# Altium PCB CNEPuckRevF.PcbDoc (part 1 of 2)
Units mil, origin at the board's own origin, x right, y up, seen from the top; angles counter-clockwise.
Board outline 3831.74 x 3902.47 mil, 4 copper layers (Top Layer, Internal Plane 1, Internal Plane 2, Bottom Layer); 165 components, 118 nets, 543 pads, 169 vias.
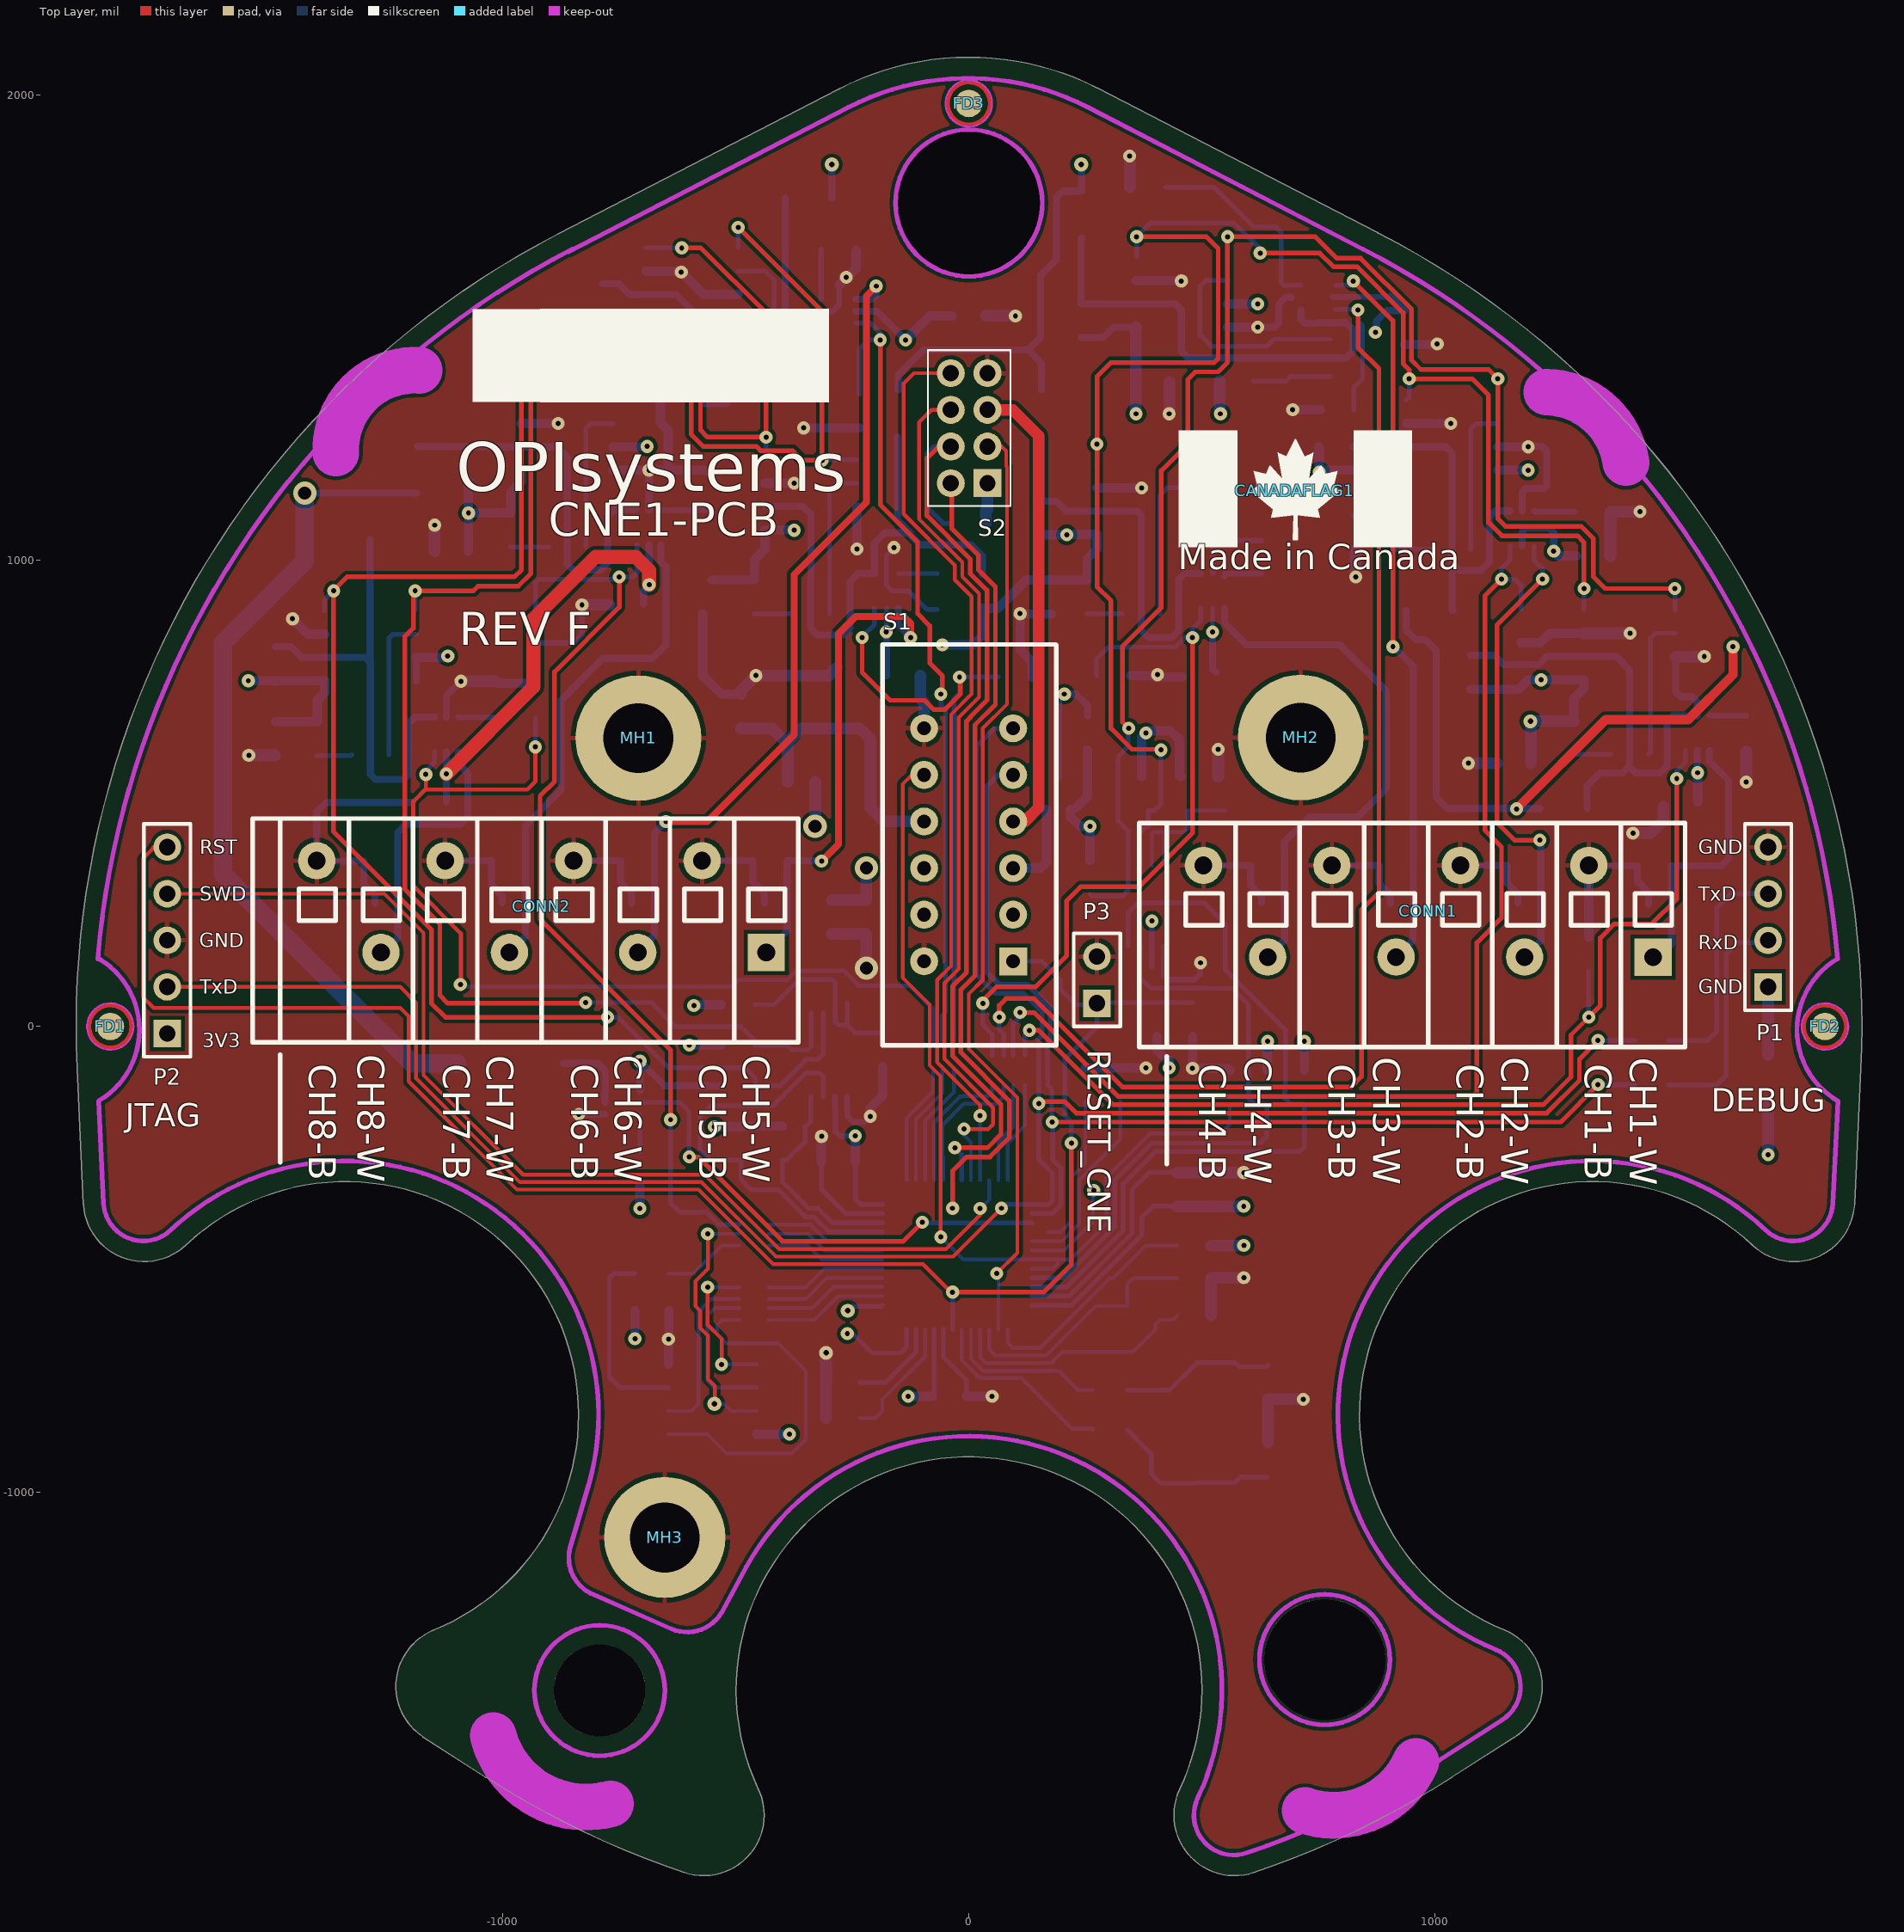
[diagram p0: Top Layer view]
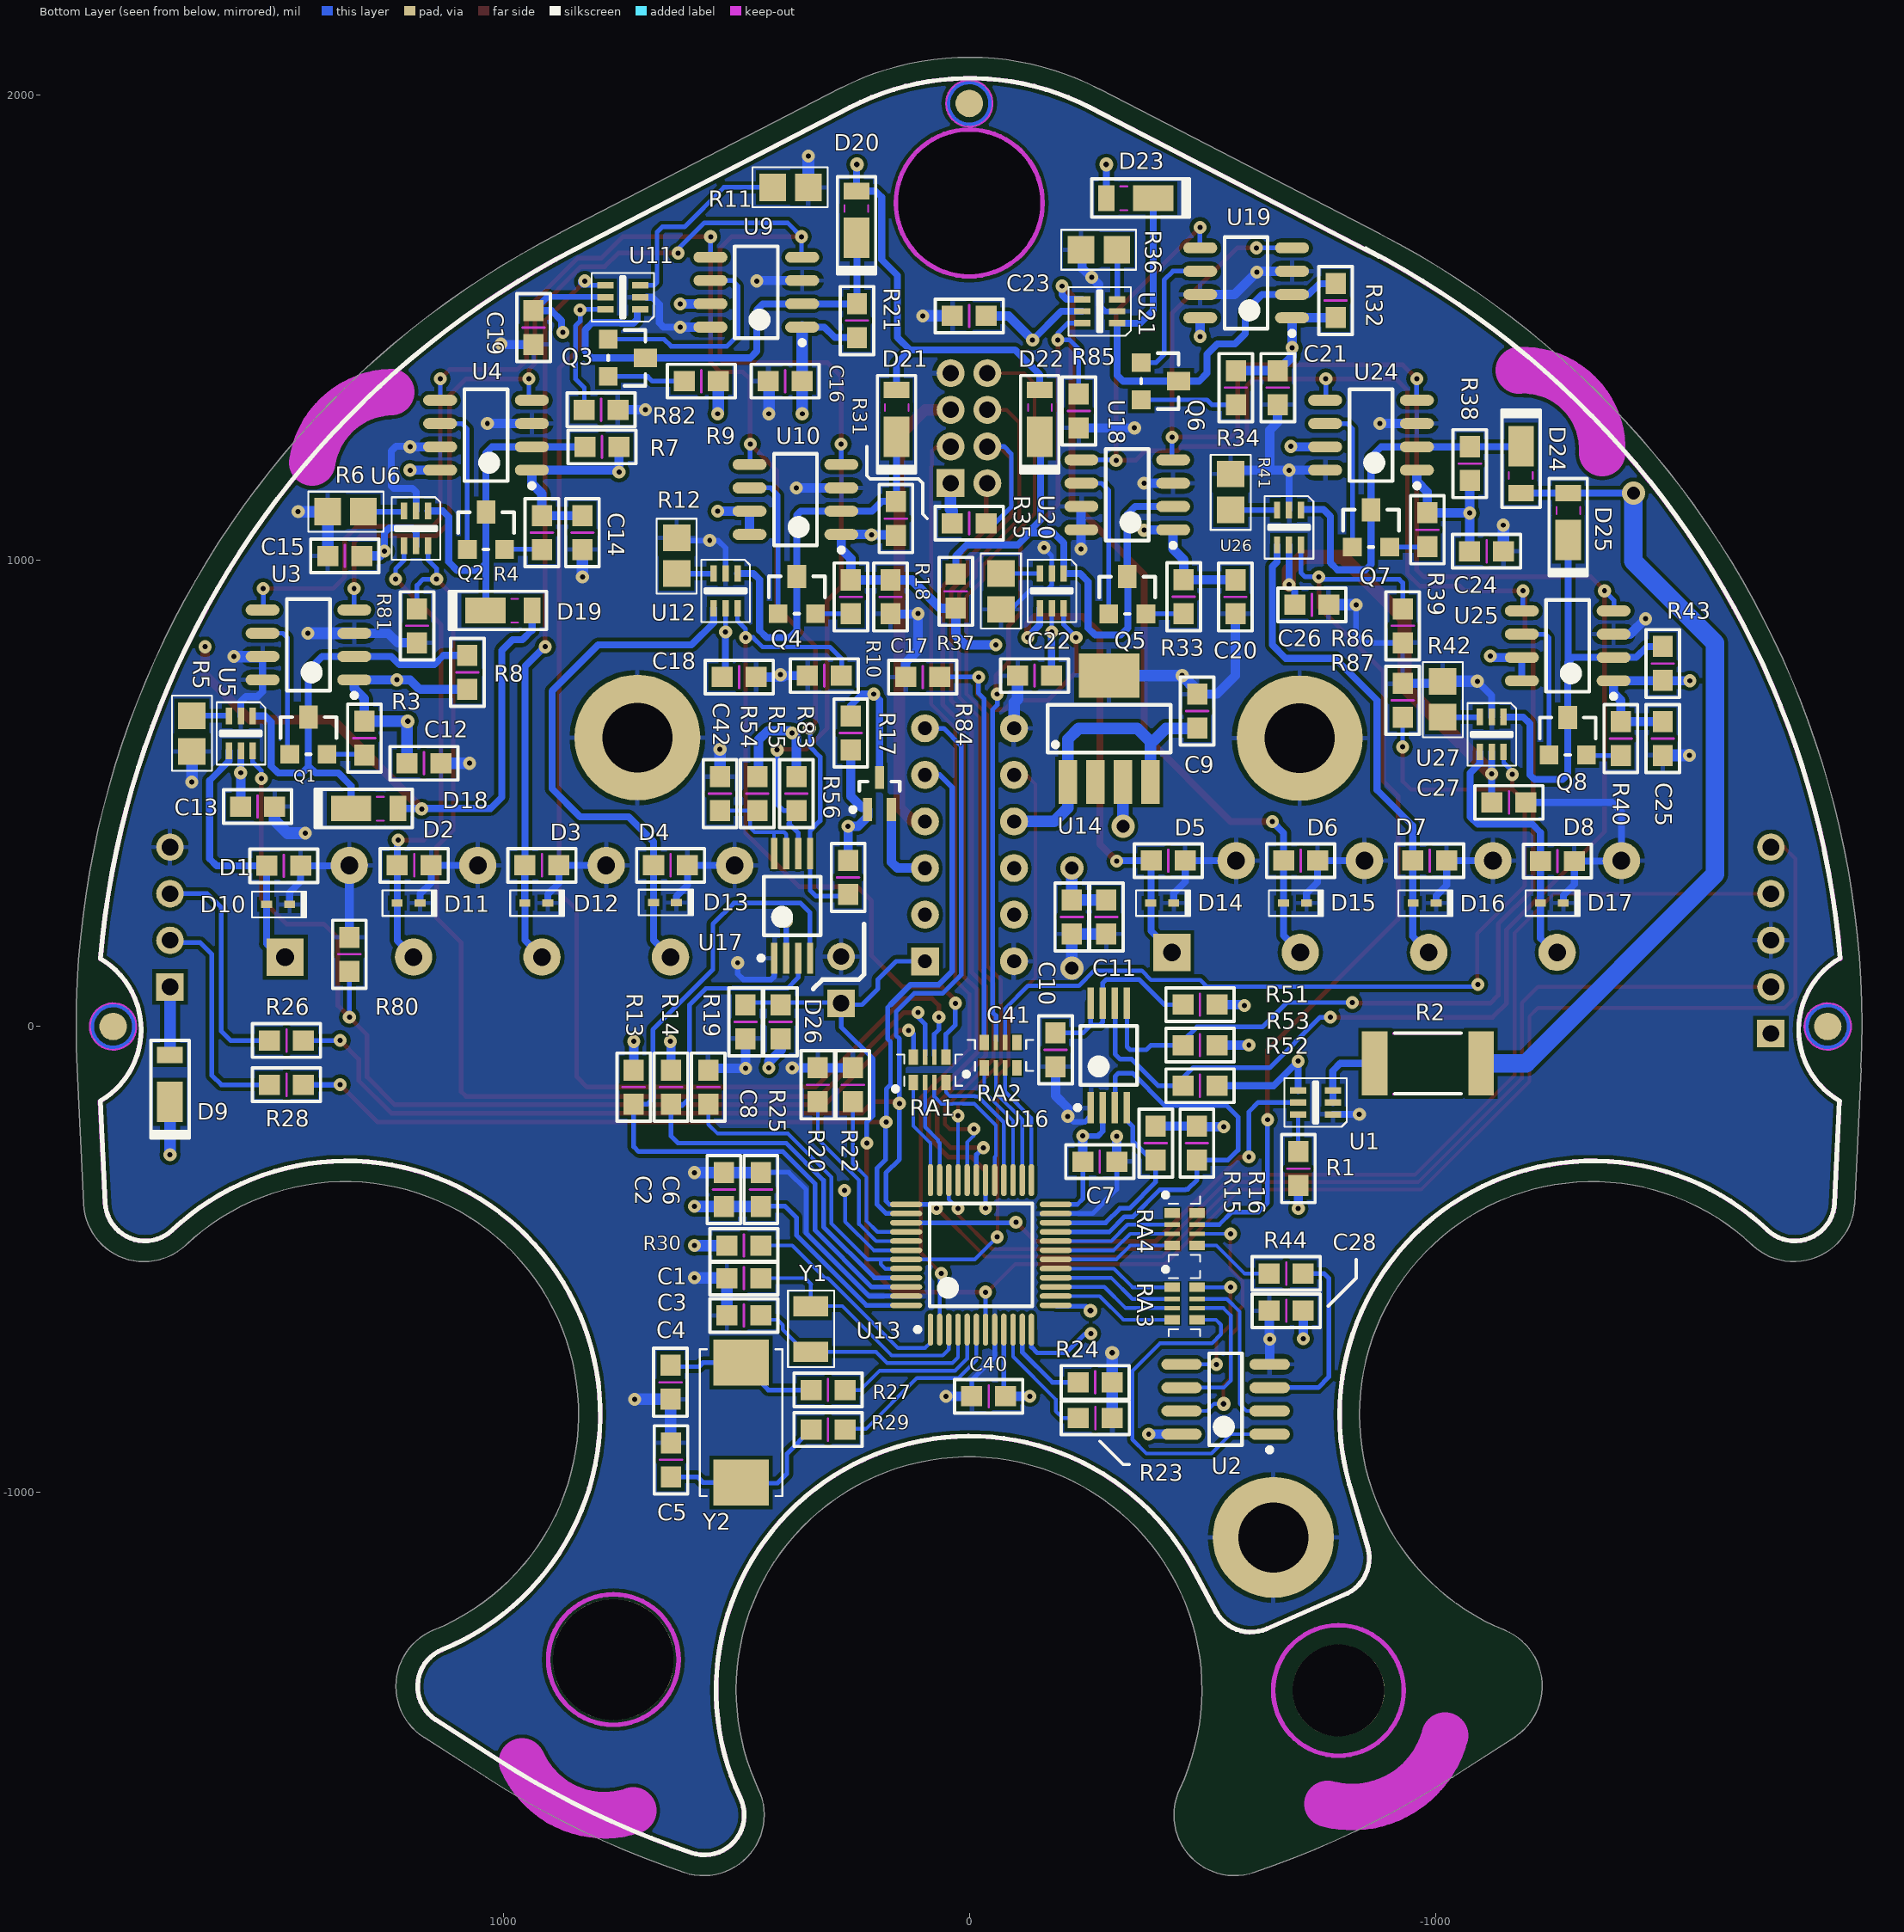
[diagram p1: Bottom Layer view, seen from below]
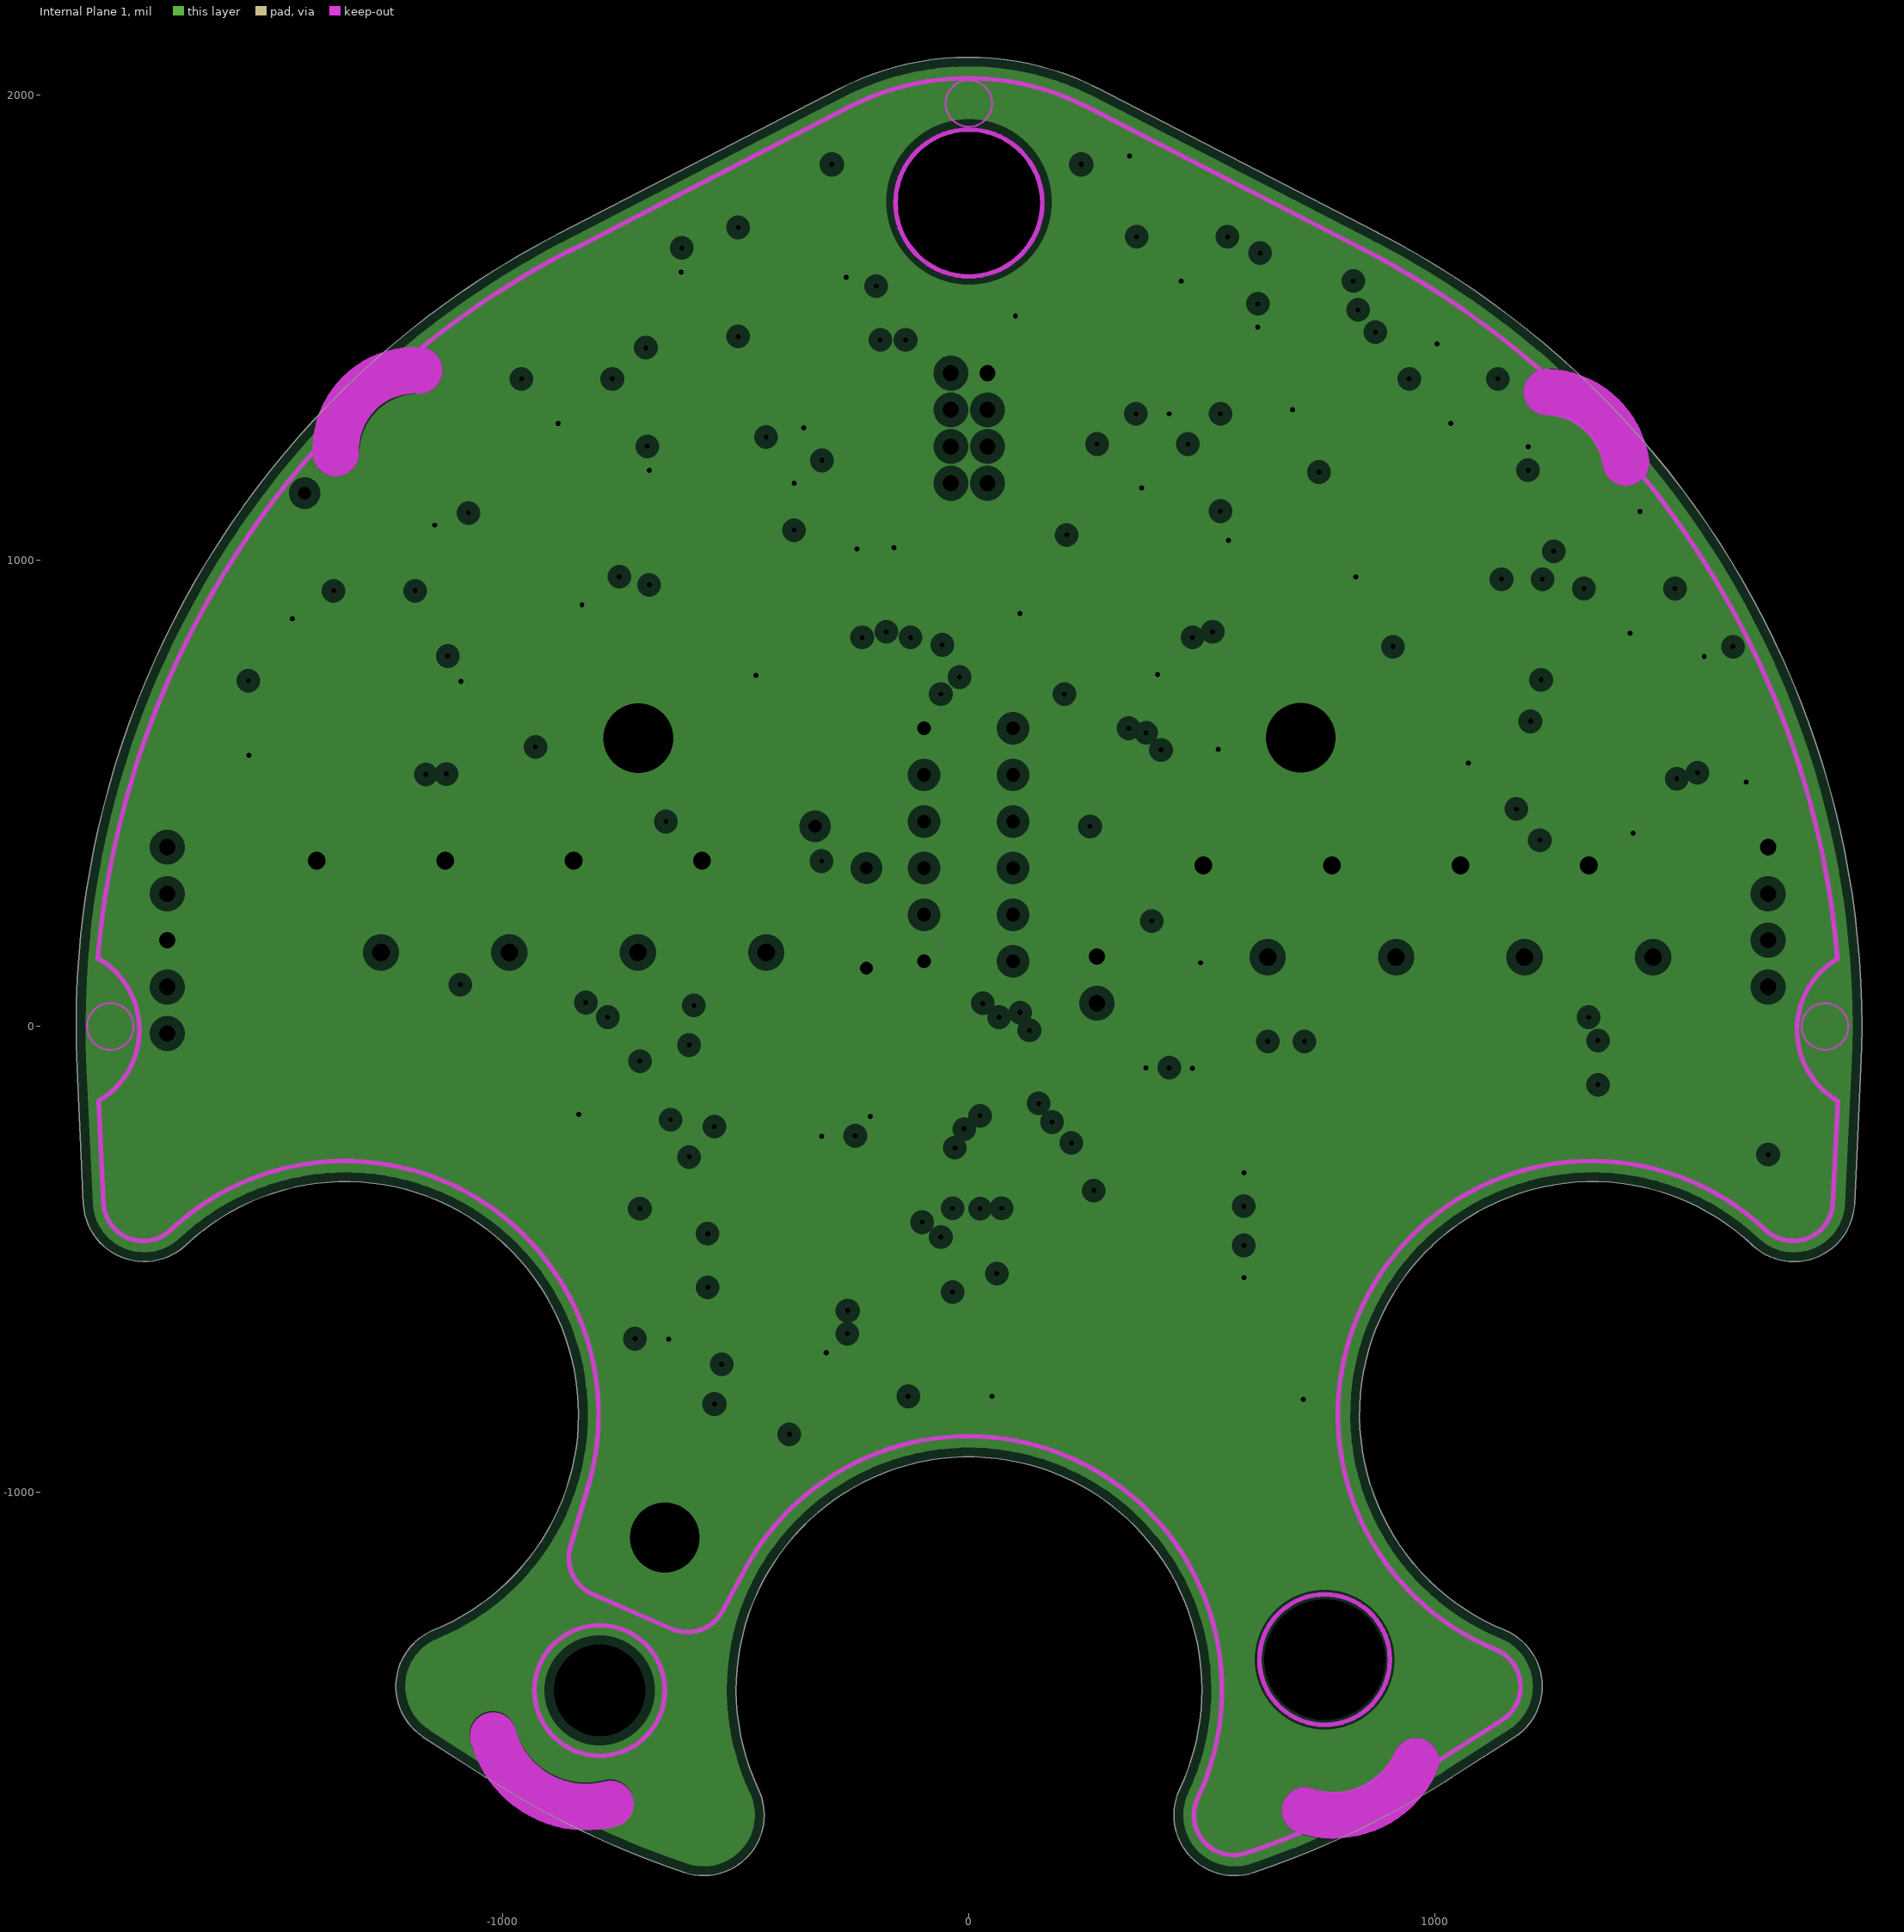
[diagram p2: Internal Plane 1, clearances drawn from the general rule]
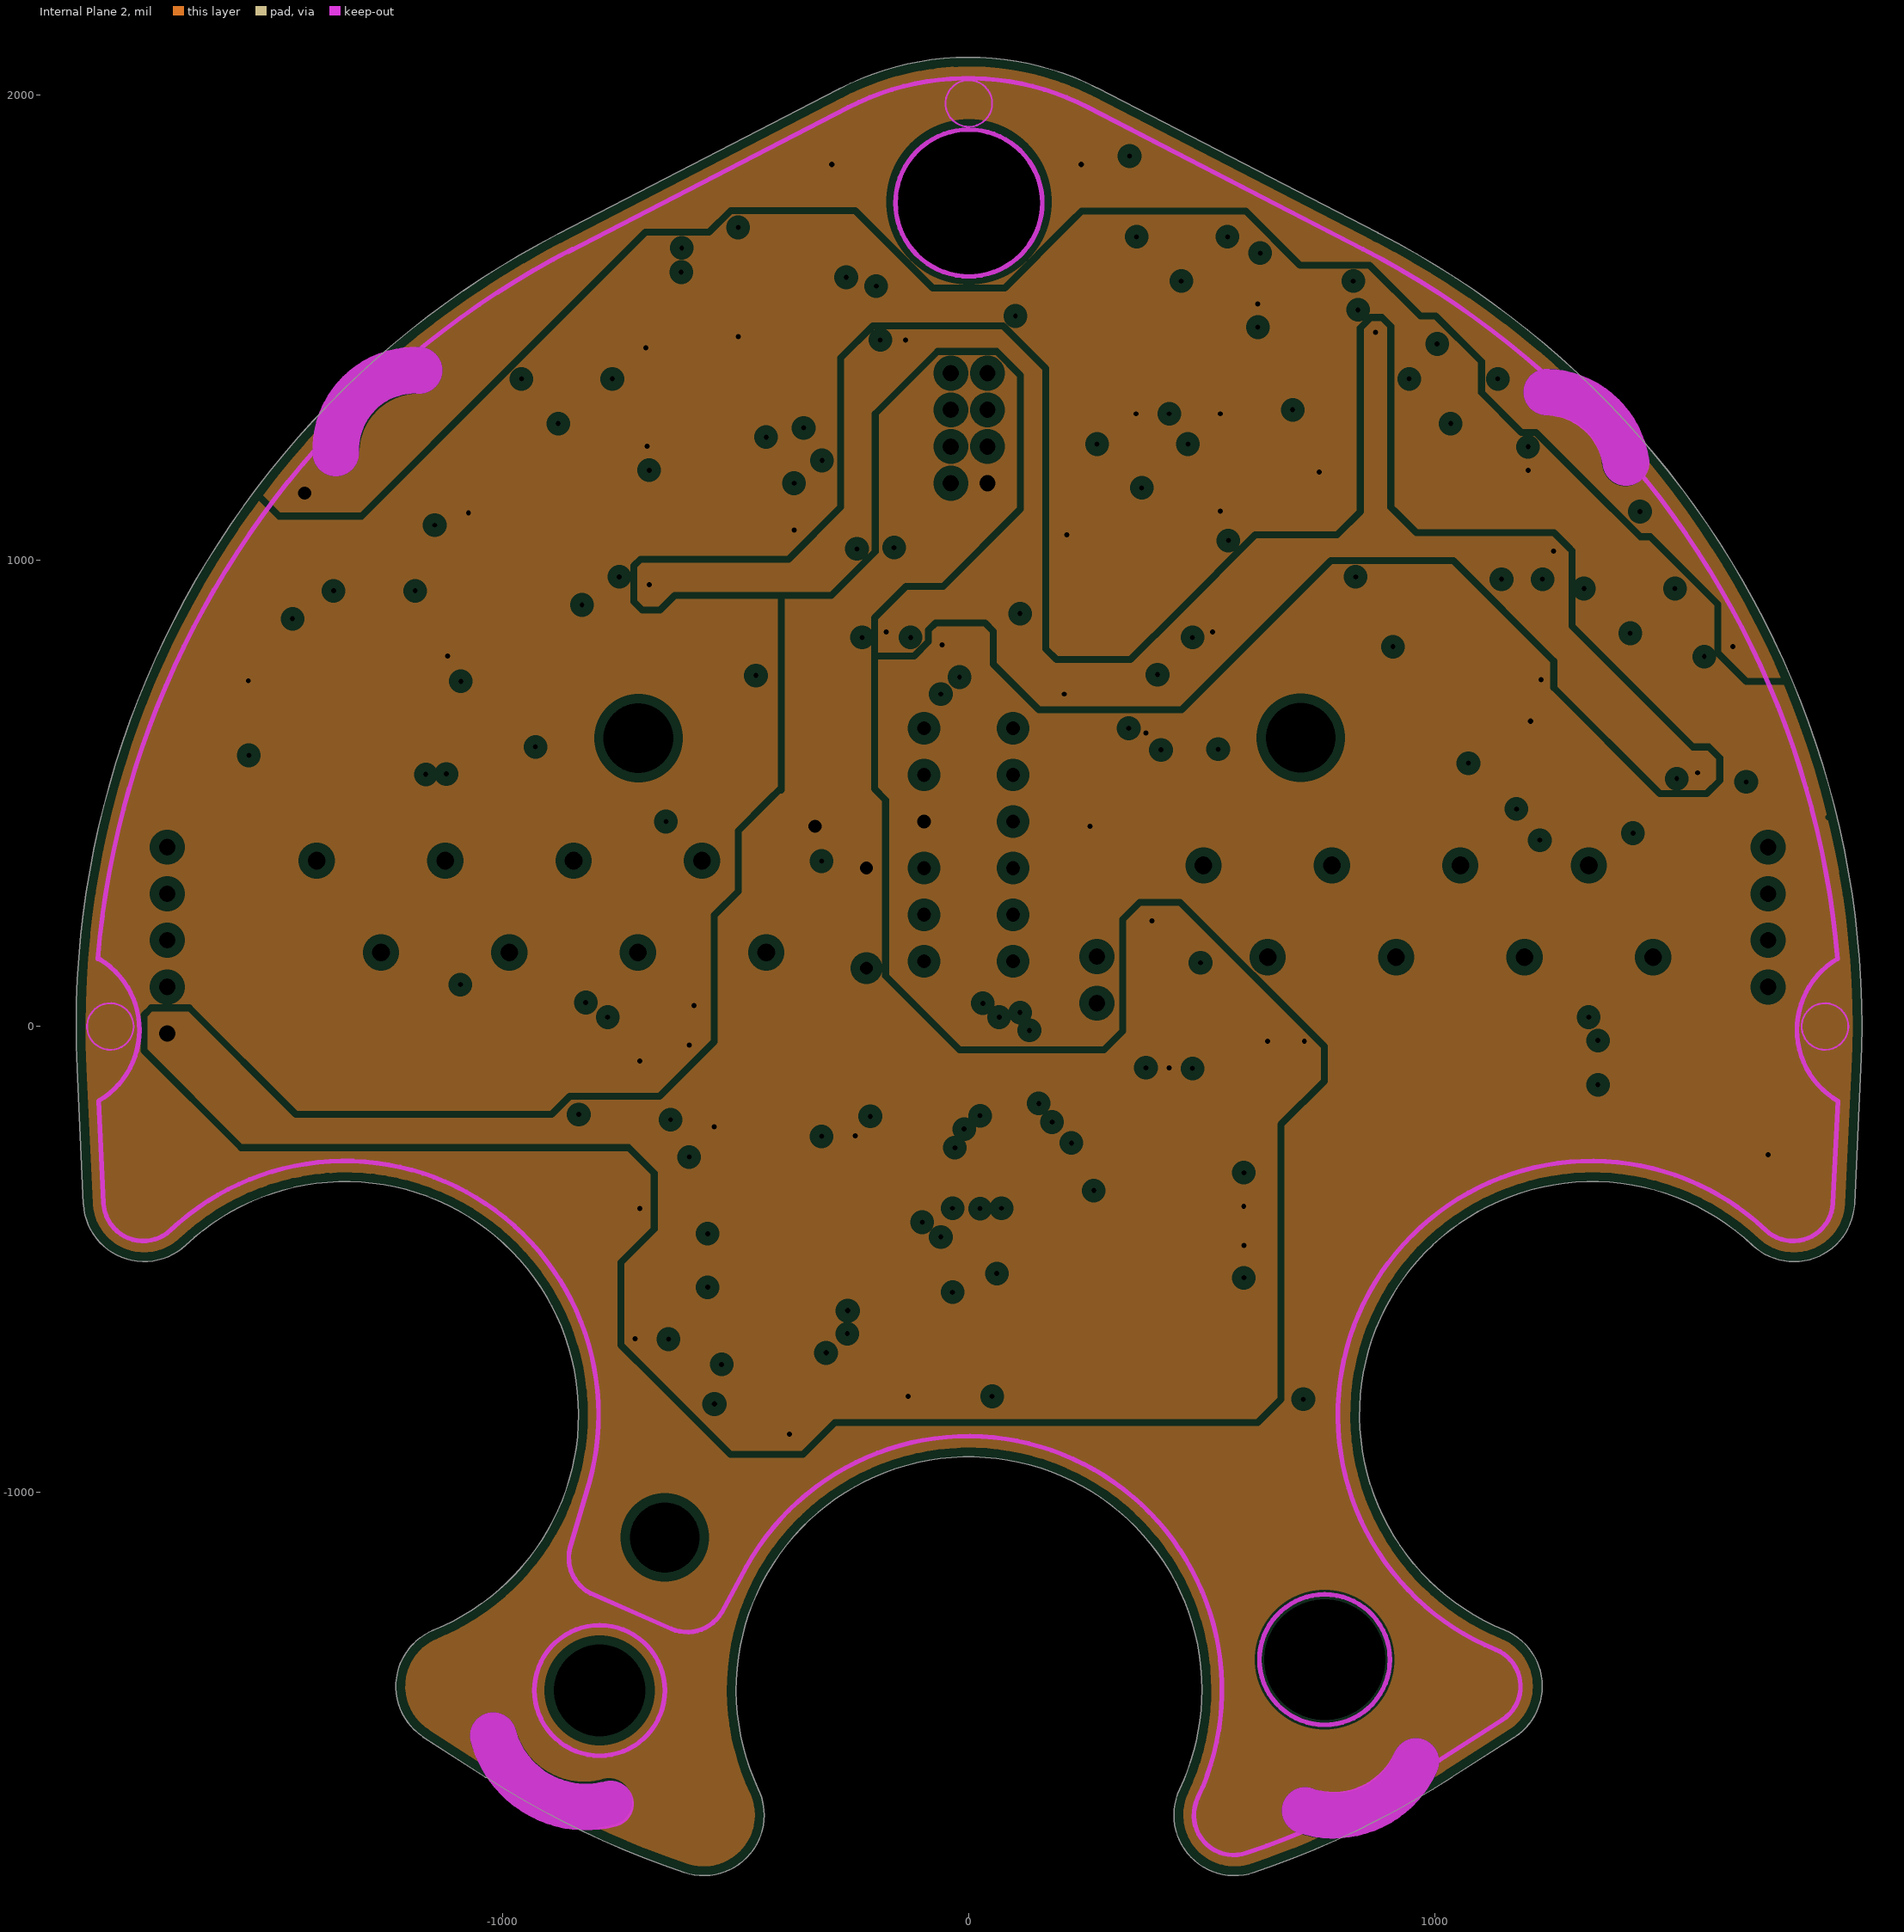
[diagram p3: Internal Plane 2, clearances drawn from the general rule]

## Layer stack, top to bottom
Top Solder: solder mask 0.4, Solder Resist, Dk 3.5
Top Layer: signal copper 1.4
Dielectric1: core 12.6, FR-4, Dk 4.8
Internal Plane 1: plane copper 1.4, net GND
Dielectric2: prepreg 12.6, FR-4, Dk 4.8
Internal Plane 2: plane copper 1.4, net (Multiple Nets)
Dielectric3: core 12.6, FR-4, Dk 4.8
Bottom Layer: signal copper 1.4
Bottom Solder: solder mask 0.4, Solder Resist, Dk 3.5

## Board outline
-1037.24,-1611.24 ccw(c-1035.89,-1609.13) -1035.13,-1611.52 ccw(c-1033.19,-1609.91) -1034.55,-1612.03 ccw(c0.48,0.2) -610.64,-1815.59 ccw(c-609.84,-1813.21) -610.58,-1815.61 ccw(c-569.13,-1692.27) -439.01,-1692.27 ccw(c-569.13,-1692.27) -451.45,-1636.75 ccw(c-453.74,-1637.78) -451.47,-1636.71 cw(c0.48,-1423.3) 500.28,-1423.3 cw(c0.48,-1423.3) 452.43,-1636.71 ccw(c454.7,-1637.78) 452.41,-1636.76 cw(c570.1,-1692.27) 452.43,-1636.71 452.41,-1636.76 ccw(c570.1,-1692.27) 611.54,-1815.61 ccw(c570.1,-1692.27) 611.6,-1815.59 ccw(c0.48,0.2) 1035.51,-1612.03 ccw(c1034.16,-1609.91) 1036.34,-1611.15 1169.37,-1525.76 ccw(c1169.15,-1523.25) 1170.5,-1525.37 ccw(c1100.21,-1415.87) 1230.33,-1415.87 ccw(c1100.21,-1415.87) 1149.41,-1295.41 ccw(c1100.21,-1415.87) 1149.36,-1295.39 1149.37,-1295.39 cw(c1338.18,-832.62) 1681.23,-469.15 ccw(c1682.96,-467.33) 1681.27,-469.19 cw(c1770.55,-374.52) 1681.23,-469.15 1681.27,-469.19 ccw(c1770.55,-374.52) 1900.53,-380.65 ccw(c1898.01,-380.53) 1900.53,-380.53 ccw(c1898.01,-380.53) 1900.5,-380.13 1914.15,-90.57 ccw(c1911.72,-89.93) 1914.23,-90.05 ccw(c0.48,0.2) 1916.36,0.2 ccw(c0.48,0.2) 879.2,1702.68 ccw(c878.04,1700.45) 877.71,1702.94 ccw(c875.35,1702.07) 876.5,1704.31 276,2014.25 ccw(c274.85,2012.02) 274.98,2014.53 ccw(c0.48,1473.57) -277.74,2012.62 ccw(c-276.59,2010.39) -278.56,2011.95 ccw(c-278.89,2009.45) -280.04,2011.69 -880.54,1701.74 ccw(c-879.38,1699.51) -881.36,1701.07 ccw(c0.48,0.2) -1913.32,-88.93 ccw(c-1911.12,-90.15) -1913.63,-90.27 -1899.93,-380.89 ccw(c-1897.42,-380.77) -1899.48,-382.21 ccw(c-1769.59,-374.52) -1680.31,-469.19 ccw(c-1769.59,-374.52) -1680.27,-469.15 cw(c-1337.22,-832.62) -1624.13,-423.38 cw(c-1337.22,-832.62) -837.42,-832.62 cw(c-1337.22,-832.62) -1148.41,-1295.39 ccw(c-1147.45,-1297.72) -1148.45,-1295.41 cw(c-1099.25,-1415.87) -1148.4,-1295.39 -1148.45,-1295.41 ccw(c-1099.25,-1415.87) -1171.09,-1524.36 ccw(c-1168.61,-1523.92) -1169.97,-1526.03

## Design rules (kind name [scope] priority, off if disabled: settings)
AssemblyTestPointUsage [All] p1 off:
AssemblyTestpoint [All] p1 off: testpointundercomponent=TRUE minsize=40 maxsize=100 preferedsize=60 minholesize=0 maxholesize=40 preferedholesize=32 testpointgrid=1 usegrid=TRUE gridtolerance=0.01 allowsidetop=TRUE allowsidebottom=TRUE
Clearance Clearance_ResArrays [(InComponent('RA1') OR InComponent('RA2') OR InComponent('RA3') OR InComponent('RA4'))] p1: gap=3 // Resistor Arrays
Clearance Clearance_U13 [InComponent('U13')] p2: gap=7
Clearance Clearance_U16_U17 [(InComponent('U16') OR InComponent('U17'))] p3: gap=4
Clearance Clearance_1 [All] p4: gap=8
Clearance Clearance_Polyies [(InNamedPolygon('Bottom GND') OR InNamedPolygon('Top GND'))] p5: gap=10
FabricationTestPointUsage [All] p1 off: valid=0 allowmultiple=FALSE
FabricationTestpoint [All] p1 off: side=3 testpointundercomponent=TRUE minsize=40 maxsize=100 preferedsize=60 minholesize=0 maxholesize=40 preferedholesize=32 testpointgrid=1 allowsidetop=TRUE allowsidebottom=TRUE usegrid=TRUE gridtolerance=0.01
HoleSize [All] p1: absolutevalues=TRUE maxlimit=620 minlimit=1 maxpercent=80.000 minpercent=20.000
MinimumSolderMaskSliver MinimumSolderMaskSliver_1 [(InComponent('RA1') OR InComponent('RA2') OR InComponent('RA3') OR InComponent('RA4'))] p1: minsoldermaskwidth=1.5
MinimumSolderMaskSliver [All] p2: minsoldermaskwidth=3
PlaneClearance [All] p1: clearance=20
PlaneConnect PlaneConnect_1 [ISVIA] p1: planeconnectstyle=Direct reliefexpansion=20 reliefentries=4 reliefconductorwidth=10 reliefairgap=10
PlaneConnect [All] p2: planeconnectstyle=Relief reliefexpansion=20 reliefentries=4 reliefconductorwidth=20 reliefairgap=10
PolygonConnect PolygonConnect_1 [ISVIA] p1: connectstyle=Direct reliefconductorwidth=10 reliefentries=4 polygonreliefangle="90 Angle" airgapwidth=10
PolygonConnect [All] p2: connectstyle=Relief reliefconductorwidth=10 reliefentries=4 polygonreliefangle="90 Angle" airgapwidth=10
RoutingVias [All] p1: holewidth=11 width=28 viastyle="Through Hole" minholewidth=11 minwidth=28 maxholewidth=150 maxwidth=300
SilkToSilkClearance [All] p1: silktosilkclearance=9
SilkToSolderMaskClearance SilkscreenOverComponentPads [IsPad] p1: minsilkscreentomaskgap=7 clearancetoexposedcopper=TRUE
SolderMaskExpansion [All] p1: expansion=4
Width [All] p1: maxlimit=100 minlimit=8 preferedwidth=8
19 further rules are at their usual default settings.

## Classes and differential pairs
component class CNEPuckCPURevF: C1 C2 C3 C4 C5 C6 C7 C8 C9 C10 C11 C28 C40 C41 C42 CANADAFLAG1 D9 D26 FD1 FD2 FD3 MH1 MH2 MH3 P1 P2 P3 R13 R14 R15 R16 R17 R18 R19 R20 R22 R23 R24 R25 R26 R27 R28 R29 R30 R44 R51 R52 R53 R54 R55 R56 RA1 RA2 RA3 RA4 S1 S2 U2 U13 U14 U16 U17 Y1 Y2
component class CNEPuckRevF_Drivers_2: C20 C21 C22 C23 C24 C25 C26 C27 CONN2 D5 D6 D7 D8 D14 D15 D16 D17 D22 D23 D24 D25 Q5 Q6 Q7 Q8 R32 R33 R34 R35 R36 R37 R38 R39 R40 R41 R42 R43 R84 R85 R86 R87 U18 U19 U20 U21 U24 U25 U26 U27
component class CNEPuckRevF_Drivers_1: C12 C13 C14 C15 C16 C17 C18 C19 CONN1 D1 D2 D3 D4 D10 D11 D12 D13 D18 D19 D20 D21 Q1 Q2 Q3 Q4 R1 R2 R3 R4 R5 R6 R7 R8 R9 R10 R11 R12 R21 R31 R80 R81 R82 R83 U1 U3 U4 U5 U6 U9 U10 U11 U12

## Components (designator, comment, footprint, x,y, rotation, side; value= is the part's Value field where it differs from the comment)
C1 "6.8pF" RC0603 483.62,-540 r0 bottom
C2 "4.7uF" RC0603 526.42,-350 r270 bottom
C3 "6.8pF" RC0603 483.62,-620 r0 bottom
C4 "20pF" RC0603 641.23,-763.58 r90 bottom
C5 "20pF" RC0603 640,-930 r270 bottom
C6 "0.1uF" RC0603 447.09,-350 r90 bottom
C7 "0.1uF" RC0603 -280,-290 r180 bottom
C8 "0.1uF" RC0603 480,10 r90 bottom
C9 "4.7uF" RC0603 -489,677 r270 bottom
C10 "4.7uF" RC0603 -220,235 r90 bottom
C11 "0.1uF" RC0603 -294.02,235 r90 bottom
C12 "0.1uF" RC0603 1170,565 r0 bottom
C13 "0.1uF" RC0603 1527,472 r180 bottom
C14 "0.1uF" RC0603 830,1060 r90 bottom
C15 "0.1uF" RC0603 1340,1010 r0 bottom
C16 "0.1uF" RC0603 395,1385 r180 bottom
C17 "0.1uF" RC0603 169,922 r90 bottom
C18 "0.1uF" RC0603 493.62,750 r180 bottom
C19 "0.1uF" RC0603 935,1500 r270 bottom
C20 "0.1uF" RC0603 -571,922 r90 bottom
C21 "0.1uF" RC0603 -662,1371 r90 bottom
C22 "0.1uF" RC0603 -140,753.17 r0 bottom
C23 "0.1uF" RC0603 0,1525 r0 bottom
C24 "0.1uF" RC0603 -1110,1020 r0 bottom
C25 "0.1uF" RC0603 -1488,618 r90 bottom
C26 "0.1uF" RC0603 -735,905 r180 bottom
C27 "0.1uF" RC0603 -1158,481 r180 bottom
C28 "0.1uF" RC0603 -680,-610 r0 bottom
C40 "0.1uF" RC0603 -41.72,-793.62 r180 bottom
C41 "0.1uF" RC0603 -185,-50 r270 bottom
C42 "0.1uF" RC0603 535,500 r90 bottom
CANADAFLAG1 "Canada Flag" CanadaFlag500x250 700,1150 r0 top
CONN1 "PC-1985250" PTSA1.5/8-3.5-Z 1468,149 r180 top locked
CONN2 "PC-1985250" PTSA1.5/8-3.5-Z -434.64,159 r180 top locked
D1 "PGB1010603NR" RC0603 1471,345 r0 bottom
D2 "PGB1010603NR" RC0603 1191,346 r0 bottom
D3 "PGB1010603NR" RC0603 917,346 r0 bottom
D4 "PGB1010603NR" RC0603 641,346 r0 bottom
D5 "PGB1010603NR" RC0603 -427,356 r0 bottom
D6 "PGB1010603NR" RC0603 -711,356 r0 bottom
D7 "PGB1010603NR" RC0603 -988,356 r0 bottom
D8 "PGB1010603NR" RC0603 -1262,355 r0 bottom
D9 "DFLS1200-7" POWERDI-123 1715,-125 r270 bottom
D10 "ESD5B5.0ST1G" SOD-523 1483,262 r0 bottom
D11 "ESD5B5.0ST1G" SOD-523 1203,265 r0 bottom
D12 "ESD5B5.0ST1G" SOD-523 929,265 r0 bottom
D13 "ESD5B5.0ST1G" SOD-523 653,266 r0 bottom
D14 "ESD5B5.0ST1G" SOD-523 -414,265 r0 bottom
D15 "ESD5B5.0ST1G" SOD-523 -699,265 r0 bottom
D16 "ESD5B5.0ST1G" SOD-523 -977,265 r0 bottom
D17 "ESD5B5.0ST1G" SOD-523 -1250,265 r0 bottom
D18 "DFLS1200-7" POWERDI-123 1290,468 r0 bottom
D19 "DFLS1200-7" POWERDI-123 1002,893 r0 bottom
D20 "DFLS1200-7" POWERDI-123 242,1729 r270 bottom
D21 "DFLS1200-7" POWERDI-123 156,1302 r270 bottom
D22 "DFLS1200-7" POWERDI-123 -151,1302 r270 bottom
D23 "DFLS1200-7" POWERDI-123 -358,1778 r180 bottom
D24 "DFLS1200-7" POWERDI-123 -1184,1209 r90 bottom
D25 "DFLS1200-7" POWERDI-123 -1285,1081 r270 bottom
D26 "SDMG0340LC" SOT-323 192.62,500 r90 bottom
FD1 "Fiducial - Round" "FIDUCIAL ROUND SMALL" -1842,0 r0 top
FD2 "Fiducial - Round" "FIDUCIAL ROUND SMALL" 1837,0 r0 top
FD3 "Fiducial - Round" "FIDUCIAL ROUND SMALL" 0,1981 r0 top
MH1 "MountingHole" MountingHole#1 -711.93,619.96 r0 top
MH2 "MountingHole" MountingHole#2 712.09,619.96 r0 top
MH3 "MountingHole" MountingHole#3 -652.47,-1096.51 r0 top
P1 "Cut to 4 Position" HDR1X4 1715,85 r90 top
P2 "Cut to 5 Position" HDR1X5 -1720,-15 r90 top
P3 "NNP" HDR1X2 275,50 r90 top
Q1 "SI2301BDS" SOT23(DGS) 1418,664 r180 bottom
Q2 "SI2301BDS" SOT23(DGS) 1037,1104 r180 bottom
Q3 "SI2301BDS" SOT23(DGS) 695,1435 r270 bottom
Q4 "SI2301BDS" SOT23(DGS) 370,966 r180 bottom
Q5 "SI2301BDS" SOT23(DGS) -339,965.61 r180 bottom
Q6 "SI2301BDS" SOT23(DGS) -449,1385 r270 bottom
Q7 "SI2301BDS" SOT23(DGS) -862,1109 r180 bottom
Q8 "SI2301BDS" SOT23(DGS) -1284,663 r180 bottom
R1 "10K" RC0603 -706,-305 r90 bottom
R2 "24R" RES2512 -984,-79 r180 bottom
R3 "51R1" RC0603 1298,619 r270 bottom
R4 "51R1" RC0603 917,1060 r270 bottom
R5 "330R" RC0805 1668,667 r270 bottom
R6 "330R" RC0805 1300,1105 r0 bottom
R7 "2K0" RC0603 788,1244 r0 bottom
R8 "2K0" RC0603 1077,760 r90 bottom
R9 "51R1" RC0603 575,1385 r0 bottom
R10 "51R1" RC0603 254,922 r270 bottom
R11 "330R" RC0805 422,1801 r180 bottom
R12 "330R" RC0805 628,972 r90 bottom
R13 "2K2" RC0603 720,-130 r270 bottom
R14 "2K2" RC0603 640,-130 r270 bottom
R15 "2K2" RC0603 -400,-250.21 r270 bottom
R16 "2K2" RC0603 -488.42,-250.21 r270 bottom
R17 "0R" RC0603 254.42,630 r90 bottom
R18 "100K" RC0603 0,1080 r180 bottom
R19 "47K" RC0603 560,-130 r270 bottom
R20 "2K2" RC0603 325,-125 r90 bottom
R21 "2K0" RC0603 241,1515 r90 bottom
R22 "2K2" RC0603 250,-125 r90 bottom
R23 "2K2 (NNP)" RC0603 -270.47,-840 r180 bottom
R24 "2K2" RC0603 -270,-763.58 r180 bottom
R25 "4k7" RC0603 405,10 r90 bottom
R26 "0R" RC0603 1465,-30 r180 bottom
R27 "0R" RC0603 303.01,-780 r180 bottom
R28 "0R" RC0603 1465,-125 r180 bottom
R29 "390R" RC0603 303.01,-865 r0 bottom
R30 "0R" RC0603 483.62,-470 r0 bottom
R31 "2K0" RC0603 157.55,1090 r90 bottom
R32 "2K0" RC0603 -786,1558 r90 bottom
R33 "51R1" RC0603 -460,922.31 r270 bottom
R34 "51R1" RC0603 -572,1371 r270 bottom
R35 "330R" RC0805 -68,972 r270 bottom
R36 "330R" RC0805 -240,1667 r180 bottom
R37 "2K0" RC0603 29,934 r90 bottom
R38 "2K0" RC0603 -1074,1208 r90 bottom
R39 "51R1" RC0603 -983,1066 r270 bottom
R40 "51R1" RC0603 -1398,618 r270 bottom
R41 "330R" RC0805 -561,1109 r90 bottom
R42 "330R" RC0805 -1016,664 r90 bottom
R43 "2K0" RC0603 -1488,779 r90 bottom
R44 "0R" RC0603 -680,-530 r180 bottom
R51 "200K" rc0603 -495,46.87 r0 bottom
R52 "2K2" rc0603 -495,-127.1 r0 bottom
R53 "2K2" rc0603 -495,-40 r0 bottom
R54 "200K" rc0603 455,500 r270 bottom
R55 "2K2" rc0603 371,500 r270 bottom
R56 "2K2" rc0603 260,320 r270 bottom
R80 "100K" RC0603 1330,155 r90 bottom
R81 "100K" RC0603 1185,860 r270 bottom
R82 "100K" RC0603 790,1323.48 r180 bottom
R83 "100K" RC0603 311,753.17 r0 bottom
R84 "100K" RC0603 100,750 r0 bottom
R85 "100K" RC0603 -235,1321 r270 bottom
R86 "100K" RC0603 -930,860 r270 bottom
R87 "100K" RC0603 -930,700 r90 bottom
RA1 "100R" EXB28V 120,-125 r180 bottom
RA2 "100R" EXB28V -32,-93.58 r180 bottom
RA3 "100R" EXB28V -430,-400 r270 bottom
RA4 "100R" EXB28V -430,-559.53 r270 bottom
S1 "7-5530843-6" EdgeConnector-6-12 95,140 r90 top locked
S2 "MMS-104-01-F-DV" HIROSE-2X4 40,1166 r90 top
U1 "FDG6342L" TS5A3160 -743,-163 r0 bottom
U2 "512Kx8" SOIC127P600X265-8N -550,-800 r0 bottom
U3 "DS2482S-100+" SOIC127P580X153-8N 1418,819 r0 bottom
U4 "DS2482S-100+" SOIC127P580X153-8N 1037,1269 r0 bottom
U5 "NLAS4157D" TS5A3160 1563,629 r270 bottom
U6 "NLAS4157D" TS5A3160 1187,1069 r270 bottom
U9 "DS2482S-100+" SOIC127P580X153-8N 457,1576 r0 bottom
U10 "DS2482S-100+" SOIC127P580X153-8N 373,1131 r0 bottom
U11 "NLAS4157D" TS5A3160 743.52,1565 r0 bottom
U12 "NLAS4157D" TS5A3160 523,935.03 r270 bottom
U13 "STM32F051C8T6" LQFP48-7x7mm -25,-490 r90 bottom
U14 "LP38693MP-3.3" SOT223 -300,639 r90 bottom
U16 "PCA9306DP" TSOP65P640X120-8N -299.21,-62.01 r90 bottom
U17 "PCA9306DP" TSOP65P640X120-8N 379.92,258.86 r90 bottom
U18 "DS2482S-100+" SOIC127P580X153-8N -339,1141 r0 bottom
U19 "DS2482S-100+" SOIC127P580X153-8N -594,1596 r0 bottom
U20 "NLAS4157D" TS5A3160 -177,935.03 r270 bottom
U21 "NLAS4157D" TS5A3160 -280,1535 r0 bottom
U24 "DS2482S-100+" SOIC127P580X153-8N -862,1269 r0 bottom
U25 "DS2482S-100+" SOIC127P580X153-8N -1284,817 r0 bottom
U26 "NLAS4157D" TS5A3160 -686,1071 r270 bottom
U27 "NLAS4157D" TS5A3160 -1121,627 r270 bottom
Y1 "32.768kHz" FX135 340,-600 r270 bottom
Y2 "8MHz" NX8045GB 489.64,-850 r270 bottom

## Footprints (in the part's own frame and the unit in brackets; to place one, negate y for a bottom-side part, rotate by r counter-clockwise, add the part's x,y. Pads: shape width x height; smd on the part's side, far side on the other; paste and mask are expansions set on the pad)
CanadaFlag500x250 [mil] "CanadaFlag, 500x250 mils"
  silkscreen extent -249,-121 251,129
EdgeConnector-6-12 [mil] "Connector, Edge, 2x6, PTH"
  rect 60x60 hole 30: 1(0,0)
  round 60 hole 30: 2(0,191) 3(100,0) 4(100,191) 5(200,0) 6(200,191) 7(300,0) 8(300,191) 9(400,0) 10(400,191) 11(500,0) 12(500,191)
  silkscreen extent -180,-93 680,280, body extent -180,-94 680,279, height 610
EXB28V [mm] "LCC, 8-Pins, Body 2.1x1.7mm (max), Pitch 0.50mm, IPC Medium Density"
  rect 0.525x0.85 smd: 1(0,0.127) 4(1.778,0.127) 5(1.778,1.499) 8(0,1.499)
  rect 0.25x0.85 smd: 2(0.635,0.127) 3(1.143,0.127) 6(1.143,1.499) 7(0.635,1.499)
  silkscreen extent -1.1,-0.35 2.67,1.65, body extent -0.15,0 1.93,1.6, height 0.55
"FIDUCIAL ROUND SMALL" [mm] "FIDUCIAL ROUND"
  round 1.5 all layers, no hole paste+0 mask+0.559: 0(0,0)
  Top Layer circle w0.203: c0,0 r1.143
  Bottom Layer circle w0.203: c0,0 r1.143
  Keep-Out Layer circle w0.1: c0,0 r1.27
FX135 [mm] "Crystal, SMD, 3.2mm x 1.5mm, Low Profile"
  rect 1.1x1.9 smd: 1(0,0) 2(2.5,0)
  silkscreen extent -0.85,-1.25 3.32,1.28, body extent -0.55,-0.95 3.05,0.95, height 0.9
HDR1X2 [mm] "Connector; Header; 2 Position"
  rect 1.5x1.5 hole 0.9: 1(0,0)
  round 1.5 hole 0.9: 2(2.54,0)
  silkscreen extent -1.27,-1.27 3.81,1.27
HDR1X4 [mm] "Connector; Header; 4 Position"
  rect 1.5x1.5 hole 0.9: 1(0,0)
  round 1.5 hole 0.9: 2(2.54,0) 3(5.08,0) 4(7.62,0)
  silkscreen extent -1.27,-1.27 8.89,1.27
HDR1X5 [mm] "Connector; Header; 5 Position"
  rect 1.5x1.5 hole 0.9: 1(0,0)
  round 1.5 hole 0.9: 2(2.54,0) 3(5.08,0) 4(7.62,0) 5(10.16,0)
  silkscreen extent -1.27,-1.27 11.43,1.27
HIROSE-2X4 [mil] "A3D-8DA-2DSE, 2mm pitch, Female"
  rect 60x60 hole 35: 1(0,0)
  round 60 hole 35: 2(0,78.74) 3(78.74,0) 4(78.74,78.74) 5(157.48,0) 6(157.48,78.74) 7(236.22,0) 8(236.22,78.74)
  silkscreen extent -49,-49 285,128, body extent -49,-49 285,128, height 165
LQFP48-7x7mm [mm] "TSQFP, 48-Leads, Body 9.2x9.2mm (max), Pitch 0.50mm, IPC Medium Density"
  oval 1.75x0.3 smd: 1(-4.075,2.75) 2(-4.075,2.25) 3(-4.075,1.75) 4(-4.075,1.25) 5(-4.075,0.75) 6(-4.075,0.25) 7(-4.075,-0.25) 8(-4.075,-0.75) 9(-4.075,-1.25) 10(-4.075,-1.75) 11(-4.075,-2.25) 12(-4.075,-2.75) 25(4.075,-2.75) 26(4.075,-2.25) 27(4.075,-1.75) 28(4.075,-1.25) 29(4.075,-0.75) 30(4.075,-0.25) 31(4.075,0.25) 32(4.075,0.75) 33(4.075,1.25) 34(4.075,1.75) 35(4.075,2.25) 36(4.075,2.75)
  oval 0.3x1.75 smd: 13(-2.75,-4.075) 14(-2.25,-4.075) 15(-1.75,-4.075) 16(-1.25,-4.075) 17(-0.75,-4.075) 18(-0.25,-4.075) 19(0.25,-4.075) 20(0.75,-4.075) 21(1.25,-4.075) 22(1.75,-4.075) 23(2.25,-4.075) 24(2.75,-4.075) 37(2.75,4.075) 38(2.25,4.075) 39(1.75,4.075) 40(1.25,4.075) 41(0.75,4.075) 42(0.25,4.075) 43(-0.25,4.075) 44(-0.75,4.075) 45(-1.25,4.075) 46(-1.75,4.075) 47(-2.25,4.075) 48(-2.75,4.075)
  silkscreen extent -4.2,-2.8 2.8,3.58, body extent -3.5,-3.5 3.5,3.5, height 1.6
MountingHole#1 [mil] "PCB Mounting Hole, 0.150\" hole, 0.270\" Keepout"
  round 270 hole 150: 1(3,-1)
MountingHole#2 [mil] "PCB Mounting Hole, 0.150\" hole, 0.270\" Keepout"
  round 270 hole 150: 1(0,0)
MountingHole#3 [mil] "PCB Mounting Hole, 0.150\" hole, 0.270\" Keepout"
  round 260 hole 150: 1(0,0)
NX8045GB [mm] "Crystal, 8MHz, SMD"
  rect 2.5x3 smd: 1(-3.262,0) 2(3.263,0)
  silkscreen extent -4,-2.25 4,2.25, body extent -4,-2.25 4,2.22, height 2
POWERDI-123 [mm] "Molded Diode, DFLS1200, 2-Leads, Body 2.8x1.8mm, IPC Medium Density"
  rect 0.9x1.4 smd: 1(-1.625,0)
  rect 2.2x1.4 smd: 2(0.925,0)
  silkscreen extent -2.41,-1.04 2.9,1.04, body extent -1.5,-0.96 1.5,0.96, height 1
PTSA1.5/8-3.5-Z [mil] "Connector, ZIF, PC-1985250,"
  rect 80x80 hole 38: 1(0,0)
  round 80 hole 38: 2(137.8,-196.85) 3(275.59,0) 4(413.39,-196.85) 5(551.18,0) 6(688.98,-196.85) 7(826.77,0) 8(964.57,-196.85)
  silkscreen extent -69,-287 1102,193, body extent -69,-287 1093,185, height 516
RC0603 [mm] "Resistor, Capacitor, 0603"
  rect 1.15x1.1 smd: 1(-0.925,0) 2(0.925,0)
  Top Layer keep-out lines w0.127: 0,0.6 0,-0.6
  silkscreen extent -1.85,-0.91 1.85,0.91, body extent -0.87,-0.48 0.88,0.47, height 0.55
rc0603 [mm] "Resistor, Capacitor, 0603"
  rect 1.15x1.1 smd: 1(-0.925,0) 2(0.925,0)
  Top Layer keep-out lines w0.127: 0,0.6 0,-0.6
  silkscreen extent -1.85,-0.91 1.85,0.91, body extent -0.87,-0.48 0.88,0.47, height 0.55
RC0805 [mm]
  rect 1.45x1.5 smd: 1(0,0) 2(1.95,0)
  silkscreen extent -1.09,-1.09 3,1.09, body extent -0.08,-0.67 2.02,0.67, height 0.5
RES2512 [mm]
  rect 1.4x3.5 smd: 1(-2.9,0) 2(2.9,0)
  silkscreen extent -1.8,-1.65 1.8,1.65, body extent -3.25,-1.73 3.25,1.72, height 0.7
SOD-523 [mm] "Molded Diode, 2-Leads, Body 1.2x0.8mm, IPC Medium Density"
  rect 0.6x0.4 smd: 1(-0.625,0) 2(0.625,0)
  silkscreen extent -1.52,-0.7 1.43,0.7, body extent -0.65,-0.45 0.65,0.45, height 0.7
SOIC127P580X153-8N [mm] "SOIC, 8-Leads, Body 5.0x4.0mm (max), Pitch 1.27mm, IPC Medium Density"
  oval 1.85x0.6 smd: 1(-2.5,1.905) 2(-2.5,0.635) 3(-2.5,-0.635) 4(-2.5,-1.905) 5(2.5,-1.905) 6(2.5,-0.635) 7(2.5,0.635) 8(2.5,1.905)
  silkscreen extent -2.62,-2.5 1.18,2.88, body extent -2,-2.5 2,2.5, height 1.53
SOIC127P600X265-8N [mm] "SOIC, 8-Leads, Body 5.0x4.0mm (max), Pitch 1.27mm, IPC Medium Density"
  oval 2.2x0.6 smd: 1(-2.4,1.905) 2(-2.4,0.635) 3(-2.4,-0.635) 4(-2.4,-1.905) 5(2.4,-1.905) 6(2.4,-0.635) 7(2.4,0.635) 8(2.4,1.905)
  silkscreen extent -2.52,-2.5 0.9,2.88, body extent -2,-2.5 2,2.5, height 1.2
SOT23(DGS) [mil]
  rect 40x50 smd: D(0,0)
  rect 40x40 smd: G(-40,-80) S(40,-80)
  silkscreen extent -60,-80 60,0
SOT223 [mm] "SOT223, 5-Leads, Body 6.7x7.3mm (max), Pitch 1.50mm, IPC Medium Density"
  rect 2.4x1 smd: 1(-2.9,2.25) 2(-2.9,0.75) 3(-2.9,-0.75) 4(-2.9,-2.25)
  rect 2.4x3.3 smd: 5(2.9,0)
  silkscreen extent -1.3,-3.35 1.3,3.35, body extent -1.85,-3.35 1.85,3.35, height 1.8
SOT-323 [mm] "SOT323, 3-Leads, Body 1.97x2.10mm, Pitch 0.65mm, IPC Medium Density"
  rect 1.25x0.5 smd: 1(-0.875,0.65) 2(-0.875,-0.65) 3(0.875,0)
  silkscreen extent -1,-1.1 0.65,1.58, body extent -0.65,-1.07 0.65,1.08, height 1.1
TS5A3160 [mm] "SOT23, 6-Leads, Body 2.2x2.4mm (max), Pitch 0.65mm, IPC Medium Density"
  rect 0.9x0.35 smd: 1(-0.95,0.65) 2(-0.95,0) 3(-0.95,-0.65) 4(0.95,-0.65) 5(0.95,0) 6(0.95,0.65)
  silkscreen extent -1.7,-1.32 1.7,1.33, body extent -0.7,-1.07 0.7,1.08, height 1.1
TSOP65P640X120-8N [mm] "TSOP, 8-Leads, Body 3.00x4.40mm, Pitch 0.65mm, IPC Medium Density"
  rect 1.7x0.35 smd: 1(-2.85,0.975) 2(-2.85,0.325) 3(-2.85,-0.325) 4(-2.85,-0.975) 5(2.85,-0.975) 6(2.85,-0.325) 7(2.85,0.325) 8(2.85,0.975)
  silkscreen extent -2.97,-1.55 1.6,1.83, body extent -2.25,-1.55 2.25,1.55, height 1.2

## Part data
C1 C3: library part C1608C0G1H6R8D, "CAP CER 6.8PF 50V NP0 0603"
C2 C9 C10: library part C1608X5R1A475K/0.50, "CAP CER 4.7UF 10V 10% X5R 0603"
C4 C5: library part CC0603JRNPO9BN200, "CAP CER 20PF 50V 5% NPO 0603"
C6 C7 C8 C11 C12 C13 C14 C15 C16 C17 C18 C19 C20 C21 C22 C23 C24 C25 C26 C27 C28 C40 C41 C42: library part 0603YC104KAT2A, "CAP CERM .1UF 10% 16V X7R 0603"
CANADAFLAG1: library part CanadaFlag
CONN1 CONN2: library part 1985250, "TERM BLOCK PCB 8POS 3.5MM GREEN"
D1 D2 D3 D4 D5 D6 D7 D8: library part PGB1010603MR, "SUPPRESSOR ESD 24VDC 0603 SMD"
D9 D18 D19 D20 D21 D22 D23 D24 D25: "DIODE SCHOTTKY 1A 200V PWRDI 123"
D10 D11 D12 D13 D14 D15 D16 D17: "TVS BIDIRECT 50W SOD523"
D26: library part SDMG0340LC-7-F, "DIODE SCHOTTKY 40V 30MA SOT323"
FD1 FD2 FD3: library part Fiducial, "Fiducial Round"
MH1 MH2 MH3: "PCB Mounting Hole, 0.150\" hole, 0.270\" Keepout"
P1: library part "Header 4", "Header, 4-Pin"
P2: library part "Header 5", "Header, 5-Pin"
P3: library part "Header 2", "Header, 2-Pin"
Q1 Q2 Q3 Q4 Q5 Q6 Q7 Q8: library part SI2301BDS-T1-E3, "MOSFET P-CH 20V 2.2A SOT23-3"
R1: library part ERJ-3GEYJ103V, "RES 10K OHM 1/10W 5% 0603 SMD"
R2: library part RMCF2512JT24R0, "RES 24 OHM 1W 5% 2512 SMD"
R3 R4 R9 R10 R33 R34 R39 R40: library part CRCW060351R1FKEAHP, "RES 51.1 OHM .25W 1% 0603 SMD"
R5 R6 R11 R12 R35 R36 R41 R42: library part ERJ-6GEYJ331V, "RES 330 OHM 1/8W 5% 0805 SMD"
R7 R8 R21 R31 R32 R37 R38 R43: library part ERJ-3EKF2001V, "RES 2K OHM 1/10W 1% 0603 SMD"
R13 R14 R15 R16 R20 R22 R23 R24 R52 R53 R55 R56: library part ERJ-3GEYJ222V, "RES 2.2K OHM 1/10W 5% 0603 SMD"
R17 R26 R27 R28 R30 R44: library part ERJ-3GEY0R00V, "RES 0.0 OHM 1/10W 0603 SMD"
R18 R80 R81 R82 R83 R84 R85 R86 R87: library part ERJ-3GEYJ104V, "RES 100K OHM 1/10W 5% 0603 SMD"
R19: library part ERJ-3GEYJ473V, "RES 47K OHM 1/10W 5% 0603 SMD"
R25: library part ERJ-3GEYJ472V, "RES 4.7K OHM 1/10W 5% 0603 SMD"
R29: library part ERJ-3GEYJ391V, "RES 390 OHM 1/10W 5% 0603 SMD"
R51 R54: library part ERJ-3GEYJ204V, "RES 200K OHM 1/10W 5% 0603 SMD"
RA1 RA2 RA3 RA4: library part EXB-28V101JX, "RES ARRAY 100 OHM 4 RES 0804"
S1: "CONN EDGECARD 6POS .100 VERT"
S2: "CONN RCPT 2MM 8POS DL VERT PCB"
U1: "IC LOAD SWITCH INTEGRATED SC70-6"
U2: library part 23LCV512-I/SN, "IC SRAM SPI 512K 2.5V 8SOIC"
U3 U4 U9 U10 U18 U19 U24 U25: "IC BRIDGE I2C TO 1-WIRE 8-SOIC"
U5 U6 U11 U12 U20 U21 U26 U27: library part NLAS4157DFT2G, "IC SWITCH SPDT SC88"
U13: "IC MCU 32BIT 64KB FLASH 48LQFP"
U14: library part LP38693MP-3.3/NOPB, "IC REG LDO 500MA 3.3V SOT223-4"
U16 U17: "IC LEVEL TRANSLATOR - TSSOP8"
Y1: library part FX135A-327, "CRYSTAL 32.768KHZ 12.5PF SMD"
Y2: library part NX8045GB-8.000000MHZ, "CRYSTAL 8.000000 MHZ 8PF SMD"

## Free pads (board coordinates)
  round 196.85 hole 196.85 unplated: 0(-792.17,-1424.85)
  round 60 on Top Overlay: 0(0,0)
  round 314.96 hole 314.96 unplated: 0(0,1770)
  round 259.84 hole 259.84 unplated: 0(763.54,-1358.66)

## Via types
v1: diameter 28, hole 11, Top Layer to Bottom Layer, tented both sides, 158 vias
v2: diameter 30, hole 12, Top Layer to Bottom Layer, tented both sides, 6 vias
v3: diameter 50, hole 28, Top Layer to Bottom Layer, 4 vias
v4: diameter 28, hole 11, Top Layer to Bottom Layer, 1 vias

## Nets (pads, with @x,y where several pads share a name; then routed paths per layer and width w, separated by ;. In a path a pad name is that pad's centre, name@x,y a point inside that pad or via, vN(x,y) a via of type N, cw(c..) or ccw(c..) an arc to the next point about the centre after c; other vN are vias at no path point)
3.3V: C2.2 C6.1 C7.1 C10.2 C11.2 C28.1 C40.2 P2.1 R13.1 R14.1 R15.1 R16.1 R18.1 R25.1 R30.2 S2.1 U2.8 U13.9 U13.24 U13.48 U14.3 U16.2 U17.2 | length 2132.6
  Bottom Layer w10: C7.1@-243.58,-290 -243.58,-370 -231.85,-381.73 U13.24@-185.43,-381.73 ; C40.2@-78.13,-793.62 -74.21,-789.7 U13.9@-74.21,-650.43 ; U13.48@135.43,-598.27 220.77,-598.27 371,-448.04 371,-410 395.4,-385.6 C2.2@525.6,-385.6 ; U17.2@392.72,128.94 U17.2@392.92,128.73
  Bottom Layer w12: U16.2@-287.2,-174.21 U16.2@-287.2,-149.87 ; U16.2@-286.42,-174.21 -286.42,-224.84 -276.65,-234.6 v1(-243.62,-234.6) ; U17.2@392.72,128.94 v1(392.72,226.34)
  Bottom Layer w20: v1(-716.42,-670) C28.1@-716.42,-610 ; v1(-546,-214.9) -489.53,-214.9 R16.1@-488.42,-213.79 R15.1@-400,-213.79 ; U2.8@-455.51,-875 v1(-385,-875) ; v1(-243.62,-234.6) v1(-243.62,-234.6) C7.1@-243.58,-290 ; v1(-130,-793.62) C40.2@-78.13,-793.62 ; R25.1@403.58,-21.42 403.58,-50 424.58,-71 427.2,-71 430,-73.8 v1(430,-88.58) ; R14.1@640,-93.58 640,-33.23 v1(641.23,-32) ; R13.1@720,-93.58 v1(720,-32)
  Bottom Layer w25: v3@-329.53,430.47 U14.3@-329.53,524.83 ; C11.2@-294.02,271.42 C10.2@-220,271.42 v3(-220,340) ; R18.1@36.42,1080 36.42,1106.3 40.12,1110 40.12,1165.88 S2.1@40,1166 ; C6.1@447.09,-386.42 524.78,-386.42 C2.2@525.6,-385.6 ; R30.2@520.04,-470 589.88,-470 v1(590,-469.88) ; C2.2@526.42,-386.42 589.06,-386.42 v1(589.88,-385.6)
  other v3: -330,430
5V: C9.2 C12.2 C14.2 C16.2 C17.2 C20.2 C21.2 C24.2 C25.2 D9.2 D26.1 R1.1 R3.1 R4.1 R7.1 R8.1 R9.1 R10.1 R17.1 R21.1 R31.1 R32.1 R33.1 R34.1 R37.1 R38.1 R39.1 R40.1 R43.1 R51.1 R52.1 R53.1 R54.1 R55.1 R56.1 S1.8 U1.4 U3.1 U4.1 U4.8 U9.1 U9.7 U10.1 U10.7 U10.8 U14.1 U14.4 U18.1 U19.1 U19.8 U24.1 U24.7 U25.1 U25.7 U25.8 | length 5567.4
  Bottom Layer w10: v1@-691,1244 v1(-690,1245) ; C20.2@-551,958.42 C20.2@-550.69,958.72 ; v1@538.58,1316.42 v1(540,1315) ; 875,1195 876,1194 ; v2@1206.42,655 v2@1206.83,655.42
  Bottom Layer w12: v1(-590,45.22) v1@-588.35,46.87 ; 751.58,1204.42 v1@762,1194
  Bottom Layer w15: R43.1@-1488.58,738 R43.1@-1484.58,742 ; U25.8@-1185.57,742 U25.7@-1185.57,792 ; v1@-1074,1103.42 -1073.58,1103 v1@-1073,1102.42 ; R32.1@-786,1521.58 R32.1@-785.42,1521 ; v1@-708.93,-393.6 v1(-706,-390.67) ; U1.4@-705.6,-137.41 v1(-705.6,-74.4) -652.9,-127.1 R52.1@-531.42,-127.1 ; C21.2@-662,1407.42 R34.1@-572,1407.42 ; R31.1@157,1054.58 R31.1@157.42,1055 ; v1(210,1055) v1@211,1056 ; R21.1@241,1478.58 288.58,1478.58 311,1501 U9.1@358.57,1501
  Bottom Layer w20: v1(-1546,742) R43.1@-1488.58,742 ; C25.2@-1488,654.42 R40.1@-1398,654.42 -1398,700 -1382.43,715.57 U25.1@-1382.43,742 R43.1@-1484.58,742 ; U25.7@-1185.57,792 v1@-1121,792 ; v1@-1121,795 v1(-1118,795) ; v1@-1074,1103.42 R38.1@-1074,1171.58 ; C24.2@-1073.58,1020 v1(-1073.58,1102) v1@-1073.58,1103 ; v1@-1073,1102.42 R39.1@-983,1102.42 -983,1147 -960.43,1169.57 U24.1@-960.43,1194 ; R32.1@-785.42,1521 U19.1@-692.43,1521 -692.43,1437.84 C21.2@-662,1407.42 R34.1@-572,1407.42 ; U24.7@-763.57,1244 v1@-691,1244 ; v1(-706,-390.67) R1.1@-706,-341.42 ; v1(-600,-40) R53.1@-531.42,-40 ; v1@-588.35,46.87 R51.1@-531.42,46.87 ; C20.2@-550.69,958.72 R33.1@-460,958.72 -460,1002 -437.43,1024.57 U18.1@-437.43,1066 v1@-375,1066 ; v1@-495.57,1481.57 U19.8@-495.57,1521 ; v1(-57,819) 9,819 29,839 R37.1@29,897.58 62.58,897.58 123.42,958.42 C17.2@169,958.42 R10.1@254,958.42 254,1004 274.57,1024.57 U10.1@274.57,1056 v1@211,1056 ; R31.1@157.42,1055 v1(210,1055) ; D26.1@218.21,465.55 218.21,450 238.75,429.47 v1(260,429.47) R56.1@260,356.42 ; 230.59,470.55 254.42,494.38 R17.1@254.42,593.58 ; R55.1@371,536.42 371,620.86 v1(380.2,630.06) 385,634.86 432.19,634.86 452.05,615 452.05,539.37 R54.1@455,536.42 ; U10.8@471.43,1056 U10.7@471.43,1106 v1(540,1106) ; U9.7@555.43,1551 v1(620,1551) ; 751.58,1204.42 R7.1@751.58,1244 ; v1@762,1194 875,1194 ; C14.2@830,1096.42 R4.1@917,1096.42 917,1144 938.57,1165.57 U4.1@938.57,1194 876,1194 ; R8.1@1077,723.58 1179.58,723.58 1200,744 v1(1228,744) U3.1@1319.57,744 1319.57,725.57 1298,704 R3.1@1298,655.42 ; U4.8@1135.43,1194 v1(1200,1194)
  Bottom Layer w25: C9.2@-489,640.58 -488.42,640 -421.71,640 -421.71,639.54 -388.58,606.42 ; U14.4@-388.58,524.83 -388.58,606.42 ; S1.8@-96,440 -182,440 -211.42,469.42 U14.1@-211.42,524.83 -211.42,616.42 -235,640 -360,640 -388.58,611.42 -388.58,606.42 ; v1(358.58,1315) U9.1@358.57,1501 ; v1@538.58,1316.42 R9.1@538.58,1385 ; C12.2@1206.42,565 v2@1206.42,655 ; v2@1206.83,655.42 R3.1@1298,655.42 ; v1(1715,-275) D9.2@1715,-161.42
  other v1: -375,1065 751.58,1190 -693,1457 -495,1481
  other v2: 1205,655
CONSTANT_POWER: C13.1 C15.1 C18.1 C19.1 C22.1 C23.1 C26.1 C27.1 D26.3 R17.2 U5.5 U6.5 U11.5 U12.5 U20.5 U21.5 U26.5 U27.5 | length 2426.7
  Top Layer w30: v1(-1121,542) -934.06,728.94 -934.06,875 -801.18,1007.87 -714.88,1007.87 -686,978.99 v1(-686,948)
  Bottom Layer w10: v1(-1121,542) U27.5@-1121,589.6 ; C26.1@-698.58,905 C26.1@-698,905.58 ; -698,936 v1(-686,948) ; v1(-177,847) U20.5@-177,897.63 ; v1(523,847) U12.5@523,897.63
  Bottom Layer w12: C27.1@-1121.58,481 C27.1@-1121,481.58 ; U11.5@780.92,1565 781.92,1566 902.42,1566 903.92,1567.5 ; C15.1@1303.58,1010 C15.1@1308.58,1010 ; v1@1563,545 v1(1563.42,544.58)
  Bottom Layer w15: C27.1@-1121,481.58 v1(-1121,542) U27.5@-1121,589.6 ; C26.1@-698,905.58 -698,936 ; v1(-686,948) -686,976 U26.5@-686,1033.6 ; U21.5@-242.6,1535 -197.4,1535 v1(-135.83,1473.43) ; C22.1@-176.42,753.17 v1@-176.42,846.42 ; D26.3@192.62,534.45 192.62,701.04 v1(205,713.42) 230,713.42 254.42,689 R17.2@254.42,666.42 ; v1(523,847) 523,767.04 C18.1@530.04,760 ; v1(872.28,1490) 875,1492.72 875,1514.83 896.58,1536.42 C19.1@935,1536.42 903.92,1567.5 ; U6.5@1187,1031.6 1187,1062 1195,1070 1245,1070 1255,1060 v1(1255,1020) ; v1@1563,545 U5.5@1563,591.6
  Bottom Layer w20: v1(-135.83,1473.43) -84.25,1525 C23.1@-36.42,1525 ; v1(1255,1020) 1265,1010 C15.1@1303.58,1010 ; C13.1@1563.42,482 v1(1563.42,544.58)
DQ1: CONN1.1 D1.2 D10.2 U5.4 | length 596.8
  Bottom Layer w10: CONN1.1@1468,149 CONN1.1@1479,149 ; CONN1.1@1507.42,178.58 1508,178
  Bottom Layer w15: CONN1.1@1479,149 1508,178 ; CONN1.1@1507.42,178.58 D1.2@1507.42,345 1615,345 1630,360 1630,528 1588.59,569.41 U5.4@1588.59,591.6
DQ2: CONN1.3 D2.2 D11.2 U6.4 | length 1002.6
  Top Layer w10: v1(1225.22,400) 1170.87,400 1133.36,437.51 1133.36,862.36 v1(1231,960)
  Bottom Layer w10: U6.4@1212.59,1031.6 1212.59,1000.42 1231,982.01 v1(1231,960)
  Bottom Layer w15: CONN1.3@1192.41,149 1227.42,184.01 v1@1227.42,387.58
DQ3: CONN1.5 D3.2 D12.2 U11.4 | length 1590
  Top Layer w10: v1(825,1600) 910,1515 910,828 904,822 910,816 v1(910,815)
  Bottom Layer w10: U11.4@787.4,1590.59 829.76,1590.59 835,1595.83 835,1601 833,1599 826,1599 v1(825,1600) ; v1(910,815) v1@910,816 ; D3.2@953.42,346 D3.2@953.61,345.81
  Bottom Layer w15: v1@910,816 953.42,772.58 D3.2@953.42,346 ; CONN1.5@916.82,149 953,185.18 D12.2@953,262.58 ; D12.2@953.61,265 D3.2@953.61,345.81
DQ4: CONN1.7 D4.2 D13.2 U12.4 | length 1175.9
  Bottom Layer w15: U12.4@548.59,897.63 548.59,866.41 596,819 796.38,819 895.38,720 895.38,510.38 835,450 730.96,450 677.42,396.46 D4.2@677.42,346 ; CONN1.7@641.23,149 677.42,185.19 D4.2@677.42,346
DQ5: CONN2.1 D5.2 D14.2 U20.4 | length 1073.1
  Top Layer w15: v1(-316,355) -280,391 -280,843 -243,880 -140,880 -125,865 v1(-125,835)
  Bottom Layer w10: CONN2.1@-434.64,159 CONN2.1@-434.64,160.36 ; D5.2@-390.58,356 D5.2@-390,356 ; v1(-125,835) v1@-125,836.01
  Bottom Layer w15: CONN2.1@-434.64,160.36 -390,205 -390,356 v1@-316,356 ; U20.4@-151.41,897.63 -151.41,862.42 v1@-125,836.01
DQ6: CONN2.3 D6.2 D15.2 U21.4 | length 1760.4
  Top Layer w15: v1(-650,440) -560.91,440 -375,625.91 -375,970 -220,1125 -220,1567.82 v1(-198.82,1589)
  Bottom Layer w10: CONN2.3@-710.23,159 CONN2.3@-710.23,159.77
  Bottom Layer w15: CONN2.3@-710.23,159.77 -674.58,195.42 -674.58,415.42 v1(-650,440) ; U21.4@-242.6,1560.59 -208.66,1560.59 -198.82,1570.43 v1(-198.82,1589)
DQ7: CONN2.5 D7.2 D16.2 U26.4 | length 1080.1
  Bottom Layer w10: CONN2.5@-985.82,159 CONN2.5@-985.82,159.18 ; -955,190 -951.58,193.42
  Bottom Layer w15: CONN2.5@-985.82,159.18 -955,190 ; -951.58,193.42 -951.58,431.1 -875,507.69 -875,700 -785,790 -679,790 -650,819 -650,987 -660.41,997.41 U26.4@-660.41,1033.6
DQ8: CONN2.7 D8.2 D17.2 U27.4 | length 588
  Bottom Layer w10: CONN2.7@-1261.41,159 CONN2.7@-1256,159
  Bottom Layer w15: CONN2.7@-1256,159 -1225.58,189.42 -1225.58,416.42 -1208,434 -1091,434 -1075,450 -1075,544 -1095.41,564.41 U27.4@-1095.41,589.6
DQ_CHANNEL_0: S1.3
DQ_CONN_1: RA1.1 U13.36 | length 219.8
  Bottom Layer w8: U13.36@83.27,-329.57 83.27,-250 120,-213.27 RA1.1@120,-125
DQ_CONN_2: RA1.2 U13.35 | length 217.5
  Bottom Layer w8: U13.35@63.58,-329.57 63.58,-250 67.27,-246.31 67.27,-243.37 94.9,-215.74 RA1.2@94.9,-125
DQ_CONN_3: RA1.3 U13.29 | length 302.9
  Bottom Layer w8: U13.29@-54.53,-329.57 -54.53,-280 -57,-277.53 -57,-212.06 -10.94,-166 12.96,-166 13.44,-165.51 34.98,-165.51 35.88,-166.42 60,-166.42 60,-165.22 75.22,-150 RA1.3@75.22,-125
DQ_CONN_4: RA1.4 U13.28 | length 291.2
  Bottom Layer w8: U13.28@-74.21,-329.57 -74.21,-205.38 -18.83,-150 -12.54,-150 -12.06,-149.51 41.61,-149.51 50.12,-141.01 RA1.4@50.12,-125
DQ_CONN_5: RA2.1 U13.27 | length 261.6
  Bottom Layer w8: U13.27@-93.9,-329.57 -93.9,-202.44 -32,-140.54 RA2.1@-32,-93.58
DQ_CONN_6: RA2.2 U13.26 | length 259.4
  Bottom Layer w8: U13.26@-113.58,-329.57 -113.58,-199.49 -57.1,-143.01 RA2.2@-57.1,-93.58
DQ_CONN_7: RA3.2 U13.20 | length 259.2
  Bottom Layer w8: RA3.2@-430,-425.1 -340,-425.1 -304.63,-460.47 U13.20@-185.43,-460.47
DQ_CONN_8: RA2.3 U13.25 | length 259.4
  Bottom Layer w8: U13.25@-133.27,-329.57 -133.27,-196.55 -76.78,-140.07 RA2.3@-76.78,-93.58
DQ_CONNECT_1: R80.1 RA1.8 U5.6 | length 2250.8
  Top Layer w10: v1@126.87,-8.13 v1(130,-8.13) 150.13,-8.13 310,-168 1232.54,-168 1292,-108.54 1292,-18.2 1355,44.8 1355,190 1385,220 1465,220 1519,274 v1(1519,532)
  Bottom Layer w10: RA1.8@120,-62.01 v1@120,-15 ; v1(1330,20) R80.1@1330,118.58 ; v1(1519,532) 1519,548.18 ; 1519.41,548.59 1519,548.18 ; U5.6@1537.41,591.6 1537.41,567.41 1519,549 1519,548.18
DQ_CONNECT_2: R81.1 RA1.7 U6.6 | length 2485.5
  Top Layer w10: v1(110,30) 140,30 320,-150 1080,-150 1090,-140 1090,180 1143,233 1143,385.54 1107.28,421.26 1107.28,924.28 v1(1143,960)
  Bottom Layer w10: RA1.7@94.9,-62.01 94.9,4.9 110,20 v1(110,30) ; U6.6@1161.41,1031.6 1161.41,1001.41 1143,983 v1(1143,960) 1171.61,960 1185,946.61 R81.1@1185,896.42
DQ_CONNECT_3: R82.1 RA1.6 U11.6 | length 2937.3
  Top Layer w10: v1(65.22,20) 65.22,45.22 80,60 140,60 330,-130 820,-130 842.5,-107.5 842.5,250.5 880,288 880,1412 835,1457 v1(835,1538)
  Bottom Layer w10: v1(65.22,20) 65.22,-6.38 75.22,-16.38 RA1.6@75.22,-62.01 ; U11.6@787.4,1539.41 833.59,1539.41 v1(835,1538) 835,1513.4 844.92,1503.48 844.92,1389.92 826,1371 826,1323.9 R82.1@826.42,1323.48
DQ_CONNECT_4: R83.1 RA1.5 U12.6 | length 1545.4
  Top Layer w10: v1(30,50) 30,56 59,85 143,85 210,152 210,270 240,300 365,300 480,415 v1(480,835)
  Bottom Layer w10: v1(30,50) 30,3.38 50.12,-16.74 RA1.5@50.12,-62.01 ; R83.1@274.58,753.17 273.62,754.13 273.62,788.62 299.5,814.5 443.49,814.5 463.99,835 v1(480,835) 480,853 497.41,870.41 U12.6@497.41,897.63
DQ_CONNECT_5: R84.1 RA2.8 U20.6 | length 1304.9
  Top Layer w10: v1(-229,835) -229,760 -169,700 -95.19,700 -75.19,680 -51.71,680 -18,713.71 -18,748 v1(-20,750)
  Bottom Layer w10: v1@-224,841.01 -202.59,862.42 U20.6@-202.59,897.63 ; RA2.8@-32,-30.59 -32,703.24 -20,715.24 v1(-20,750) R84.1@63.58,750
DQ_CONNECT_6: R85.1 RA2.7 U21.6 | length 1800.4
  Top Layer w10: v1(-190,1473.59) -190,1120 -110,1040 -110,886 -84,860 -84,780.17 -57,753.17 -57,723 -60,720 v1(-60,713.42)
  Bottom Layer w10: U21.6@-242.6,1509.41 -242.01,1510 -211.77,1510 -190,1488.23 v1(-190,1473.59) -215.41,1473.59 -235,1454 R85.1@-235,1357.42 ; v1@-60,720 v1(-60,713.42) -60,690 -50,680 -50,30.25 -57.1,23.15 RA2.7@-57.1,-30.59
DQ_CONNECT_7: R86.1 RA3.7 U26.6 | length 2038.9
  Top Layer w10: v1(-750,965) -750,900 -888.98,761.02 -888.98,526.02 -920,495 -920,230 -640,-50 v1(-640,-200)
  Bottom Layer w10: R86.1@-930,896.42 -930,952.34 -922.84,959.5 -755.5,959.5 v1(-750,965) -720.59,965 -711.59,974 U26.6@-711.59,1033.6 ; v1(-640,-200) -640,-378.2 -620,-398.2 -563.21,-398.2 -536.32,-425.1 RA3.7@-492.99,-425.1
DQ_CONNECT_8: R87.1 RA2.6 U27.6 | length 2097.2
  Top Layer w9: v1(-1165,541) -1165,510 ; v1(-1091,90) -1091,81 -1090,80 -1090,199.75 -1192,301.75 -1192,483 -1165,510 ; v1(-930,600) -930,526.02 -947.52,508.5 -1165,508.5 -1165,510
  Bottom Layer w9: v1(-1091,90) -1091,87 -1089.49,85.49 -510,85.49 -495.49,100 -390,100 -370,120 -268.03,120 -235.53,87.5 -126,87.5 -76.78,38.28 RA2.6@-76.78,-30.59 ; v1(-930,600) R87.1@-930,663.58
  Bottom Layer w10: v1(-1165,541) -1165,548 -1146.59,566.41 U27.6@-1146.59,589.6
DQ_DEFIB: D18.1 D19.1 D20.1 D21.1 D22.1 D23.1 D24.1 D25.1 R2.2 | length 4093.3
  Top Layer w20: v1(1175,467) 1366.46,658.46 1543.31,658.46 1639.76,754.92 v1(1639.76,815)
  Bottom Layer w15: v3(-1425,1145.02) -1424.95,1144.98 D25.1@-1285,1144.98 ; D25.1@-1285,1145.02 D24.1@-1184,1145.02 ; D23.1@-294.02,1778 v2(-294.02,1850) ; D22.1@-151,1365.98 -151,1399.2 -98.2,1452 127,1452 ; D21.1@156,1365.98 156,1423 127,1452 ; v2(241,1850) 242,1849 D20.1@242,1792.98 200.98,1792.98 188,1780 188,1646 154,1612 154,1479 127,1452 ; D19.1@938.02,893 938.02,850 939,850 959,830 980,830 1003,807 1003,492 1027,468 D18.1@1226.02,468
  Bottom Layer w40: v3(-1425,1145.02) -1425,998.23 -1600.39,822.83 -1600.39,326.77 -1194.62,-79 R2.2@-1098.17,-79
DQ_DEFIB_MASTER: U1.5 U13.39 | length 1040.6
  Top Layer w10: v1(-600,-280) -580.7,-280 -399.96,-460.74 -140.74,-460.74 v1(-100,-420) v1@-98.52,-418.52
  Bottom Layer w10: U1.5@-705.6,-163 -620,-163 -600,-183 v1(-600,-280) ; v1(-100,-420) -98.9,-421.1 U13.39@135.43,-421.1
GND: C1.2 C2.1 C3.2 C4.1 C5.1 C6.2 C7.2 C8.1 C9.1 C10.1 C11.1 C12.1 C13.2 C14.1 C15.2 C16.1 C17.1 C18.2 C19.2 C20.1 C21.1 C22.2 C23.2 C24.1 C25.1 C26.2 C27.2 C28.2 C40.1 C41.2 C42.2 CONN1.2 CONN1.4 CONN1.6 CONN1.8 CONN2.2 CONN2.4 CONN2.6 CONN2.8 D1.1 D2.1 D3.1 D4.1 D5.1 D6.1 D7.1 D8.1 D10.1 D11.1 D12.1 D13.1 D14.1 D15.1 D16.1 D17.1 MH1.1 MH2.1 MH3.1 P1.4 P2.3 P3.2 R5.2 R6.2 R11.2 R12.2 R19.1 R20.2 R22.2 R23.2 R24.2 R35.2 R36.1 R41.2 R42.2 R80.2 R81.2 R82.2 R83.2 R84.2 R85.2 R86.2 R87.2 S1.2 S1.12 S2.7 U1.1 U2.4 U3.3 U3.7 U3.8 U4.3 U4.7 U5.2 U6.2 U9.3 U9.8 U10.3 U11.2 U12.2 U13.8 U13.23 U13.47 U14.5 U16.1 U17.1 U18.3 U18.7 U18.8 U19.3 U19.7 U20.2 U21.2 U24.3 U24.8 U25.3 U26.2 U27.2 | length 9945.9
  Bottom Layer w10: CONN2.8@-1399.2,355.85 CONN2.8@-1398.35,355 ; CONN2.6@-1123.61,355.85 CONN2.6@-1123.46,356 ; CONN2.4@-848.02,355.85 CONN2.4@-847.87,356 ; CONN2.2@-572.43,355.85 CONN2.2@-572.28,356 ; R41.2@-569.23,1194 R41.2@-561,1185.77 ; C7.2@-316.42,-290 -316.42,-349.18 -264.18,-401.42 U13.23@-185.43,-401.42 ; v1@-150.5,1028 -159,1028 -177,1010 U20.2@-177,972.43 -177,947 -165,935 -130,935 -90.23,895.23 R35.2@-68,895.23 ; U13.8@-54.53,-650.43 -54.53,-709.53 -5.3,-758.76 C40.1@-5.3,-793.62 ; U13.47@135.43,-578.58 215,-578.58 350,-443.58 350,-350.16 387.4,-312.76 C2.1@525.6,-312.76 ; v1@455,1601 v1(456,1600) ; CONN1.6@779.02,345.85 CONN1.6@779.17,346 ; v1@1003.58,1463.58 v1(1005,1465) ; CONN1.4@1054.61,345.85 CONN1.4@1054.76,346 ; CONN1.2@1330.2,345.85 CONN1.2@1331.05,345
  Bottom Layer w12: C25.1@-1488.42,582 C25.1@-1488,581.58 ; v1@-1146.42,1075.58 v1(-1146,1076) ; R86.2@-930,823.58 -847.87,823.58 -830,841.46 v1(-830,905) ; U21.2@-317.4,1535 -292,1535 -278,1549 -278,1592 ; U16.1@-261.61,-149.87 -261.61,-180 U16.1@-260.83,-180.79 ; U16.1@-260.83,-174.21 U16.1@-260.83,-180.79 ; -243,1627 -242,1627 ; R36.1@-242,1665 R36.1@-240,1667 ; v1(-211.42,-192.68) -223.16,-204.42 -248.42,-204.42 -260.83,-192.01 U16.1@-260.83,-180.79 ; v1(345,1868) v1@345.23,1867.77 ; U17.1@418.31,146.65 418.31,107.75 425,101.06 485.14,101.06 497.05,112.96 v1(497.05,136.81) ; U17.1@418.92,146.65 U17.1@418.92,172.86 ; C16.1@430,1383.58 C16.1@431.42,1385 ; U12.2@523,972.43 523,1027 538.77,1042.77 R12.2@628,1042.77 ; v1@530.04,600 v1(535,595.04) ; v1(1200,1244) v1@1201,1245 ; R6.2@1376.77,1105 R6.2@1381.42,1100.35
  Bottom Layer w15: CONN2.8@-1399.2,355.85 -1399.2,460.8 -1379,481 C27.2@-1194.42,481 ; CONN2.8@-1398.35,355 D8.1@-1298.42,355 -1298.42,305.42 -1274.61,281.61 D17.1@-1274.61,265 ; CONN2.6@-1123.46,356 D7.1@-1024.42,356 -1024.42,303.42 -1001.61,280.61 D16.1@-1001.61,265 ; U27.2@-1121,664.4 -1121,710 v1(-1090,741) ; CONN2.4@-847.87,356 D6.1@-747.42,356 -747.42,309.42 -723.61,285.61 D15.1@-723.61,265 ; v1(-837,-188.59) U1.1@-780.4,-188.59 ; U26.2@-686,1108.4 v1(-686,1194) ; CONN2.2@-572.28,356 D5.1@-463.42,356 -463.42,310.42 -438.61,285.61 D14.1@-438.61,265 ; U18.7@-240.57,1116 U18.7@-240,1115.43 ; CONN1.8@503.58,346 D4.1@604.58,346 604.58,303.42 628.39,279.61 D13.1@628.39,266 ; v1(620,1501) 656,1501 665,1510 665,1550 680,1565 U11.2@692.1,1565 ; CONN1.6@779.17,346 D3.1@880.58,346 880.58,307.42 904.39,283.61 D12.1@904.39,265 ; CONN1.4@1054.76,346 D2.1@1154.58,346 1154.58,308.42 1178.39,284.61 D11.1@1178.39,265 ; U6.2@1187,1106.4 1187,1147 1195,1155 1235,1155 1240,1160 1240,1235 1230,1245 v1@1201,1245 ; CONN1.2@1331.05,345 D1.1@1434.58,345 1434.58,311.42 1458.39,287.61 D10.1@1458.39,262 ; U3.7@1516.43,794 U3.8@1516.43,744 1516.43,718.57 1527,708 1552,708 1563,697 U5.2@1563,666.4
  Bottom Layer w20: v1(-1451,875) -1418,842 U25.3@-1382.43,842 ; R42.2@-1016.23,741 R42.2@-1016,740.77 -1011.65,736.42 R87.2@-930,736.42 ; U24.3@-960.43,1294 v1(-881,1294) ; U24.8@-763.57,1194 v1(-686,1194) -645,1194 ; U19.3@-692.43,1621 -619,1621 v1(-617,1619) -569,1571 U19.7@-495.57,1571 ; C21.1@-661.42,1345 -661.42,1296.42 -645,1280 -645,1194 ; U2.4@-644.49,-725 v1(-644.49,-670.91) -643.58,-670 C28.2@-643.58,-610 ; C20.1@-571,885.58 -571,753.17 -531.24,713.42 C9.1@-489,713.42 ; R41.2@-569.23,1194 -645,1194 ; U18.3@-437.43,1166 v1(-375,1166) ; v1@-356,1283 v1(-354.42,1284.58) R85.2@-235,1284.58 ; C7.2@-316.42,-290 -316.42,-236.2 v1(-316,-235.79) ; -278,1592 -243,1627 ; -242,1627 R36.1@-242,1665 ; v1(-240,1025) U18.7@-240,1115.43 ; v1(-211.42,-192.68) -211.42,-175.04 -185,-148.62 C41.2@-185,-86.42 ; C40.1@-5.3,-793.62 v1(50,-793.62) ; v1(110,886) 110,808 136.42,781.58 R84.2@136.42,750 ; v1@111,885 C17.1@177.42,885 ; R22.2@250,-88.58 R20.2@325,-88.58 v1(380,-88.58) ; U10.3@274.57,1156 v1(371,1156) ; R83.2@347.42,753.17 v1@396.75,753.17 ; U9.3@358.57,1601 v1@455,1601 ; v1@399.93,750 C18.2@457.2,750 ; C8.1@480,-21.42 v1(480,-90) 556.42,-90 R19.1@560,-93.58 ; U9.8@555.43,1501 v1(620,1501) ; C5.1@640,-893.58 C5.1@641.23,-892.35 ; v1(695,1323.48) R82.2@753.58,1323.48 ; C19.2@935,1463.58 v1@1003.58,1463.58 ; U4.3@938.57,1294 v1(1034,1294) ; U4.7@1135.43,1244 v1(1200,1244) ; R81.2@1185,823.58 1226.58,823.58 1247,844 U3.3@1319.57,844 ; R80.2@1330,191.42 1330,345.65 CONN1.2@1330.2,345.85
  Bottom Layer w25: v1(-1545,582) C25.1@-1488.42,582 ; C24.1@-1146.42,1020 v1@-1146.42,1075.58 ; v1(-1090,741) R42.2@-1016.23,741 ; v1(-830,905) C26.2@-771.42,905 ; C9.1@-489,713.42 -489,721 v1(-456.83,753.17) U14.5@-300,753.17 U14.5@-283.17,770 ; R23.2@-306.89,-840 R24.2@-306.89,-764.05 ; v2@-306.89,-700 v2(-306.42,-700.47) R24.2@-306.42,-763.58 ; C11.1@-294.02,198.58 C10.1@-220,198.58 v3(-220,125) ; C22.2@-103.58,753.17 -103.58,702.58 -96,695 S1.12@-96,640 ; C23.2@36.42,1525 v1(100,1525) ; R11.2@345.23,1801 v1@345.23,1867.77 ; v1(430,1315) C16.1@430,1383.58 ; C6.2@447.09,-313.58 524.78,-313.58 C2.1@525.6,-312.76 ; C3.2@520.04,-620 C1.2@520.04,-540 520.83,-539.21 v1(590,-539.21) ; C2.1@526.42,-313.58 v1(590,-313.58) ; C42.2@535,536.42 v1(535,595.04) ; C5.1@641.23,-892.35 C4.1@641.23,-800 v1(717.76,-800) ; v1(830,965) C14.1@830,1023.58 ; v1(1072,565) C12.1@1133.58,565 ; U3.3@1319.57,844 v1(1419,844) ; C15.2@1376.42,1010 R6.2@1376.42,1100.35 ; R6.2@1376.77,1105 v1(1440,1105) ; v1(1425,415) 1463,415 1490.58,442.58 C13.2@1490.58,472 ; U3.7@1516.43,794 v1(1578,794) ; v1(1668,525) R5.2@1668,590.23
  other v1: 405,755 -160.5,1028 557,1043 -263,1608
I2C_SCL1: R55.2 U3.4 U4.4 U9.4 U10.4 U17.6 | length 3649.9
  Top Layer w10: v1(360,1695) 510,1695 535,1670 535,1433.28 526.72,1425 305,1425 275,1395 v1(275,1250) 275,944 305,914 305,639.86 350,594.86 v1@412.2,594.86 ; v1(625,1660) 753.06,1660 782.3,1630.76 833.01,1630.76 932,1531.77 932,1422.54 945,1409.54 v1(945,1390) 1080,1390 1115,1355 1115,1081.72 1143.72,1053 1306,1053 1320,1039 v1(1320,940)
  Bottom Layer w10: U10.4@274.57,1206 275,1206.42 v1(275,1250) ; U9.4@360,1652.42 v1(360,1695) 390,1725 568.59,1725 625,1668.59 v1(625,1660) ; U17.6@367.13,371.06 367.13,415.81 387.4,436.08 387.4,432.63 385,430.23 ; U17.6@367.92,344.86 U17.6@367.92,371.06 ; 385,437.87 385,463.58 398.6,463.58 412.2,477.18 v1(412.2,593.58) ; U4.4@938.57,1344 945,1350.43 v1(945,1390) ; U3.4@1320,894.42 v1(1320,940)
I2C_SCL2: R52.2 U16.6 U18.4 U19.4 U24.4 U25.4 | length 4244.3
  Top Layer w10: v1(-775,20) -1123,20 -1153,50 -1153,208 -1363,418 -1363,936 -1334,965 -975,965 -960,980 v1(-960,1390) -930,1420 -590,1420 -575.91,1405.91 -575.91,1280 -560.91,1265 v1(-435,1265) -435,1531 -575,1671 v1(-616,1671)
  Bottom Layer w10: U25.4@-1383,892.57 -1383,915 v1(-1363,935) ; U24.4@-960,1344.42 v1(-960,1390) ; v1(-775,20) -753.07,20 -644.49,-88.58 -502.02,-88.58 -501.42,-87.98 -480.6,-87.98 -458.58,-110 R52.2@-458.58,-127.1 -405.37,-127.1 -348.27,-70 -323.96,-70 -312.8,-58.84 -312.8,28.08 U16.6@-312.01,28.87 ; U19.4@-692.43,1671 v1(-616,1671) ; U18.4@-435,1218.42 v1(-435,1265)
I2C_SDA1: R56.2 U3.5 U4.5 U9.5 U10.5 U17.5 | length 3377.4
  Top Layer w10: v1(343.04,640) 330,653.04 330,816 413,899 413,1193 v1(470,1250) 470,1389 486,1405 535,1405 555,1425 v1(555,1695) 743.52,1695 789.76,1648.76 840.47,1648.76 950,1539.23 950,1430 970,1410 1115,1410 v1(1135,1390) 1135,1090 1152,1073 1314.28,1073 1340,1047.28 1340,965 1365,940 v1(1515,940)
  Bottom Layer w10: R56.2@260,283.58 263.98,279.61 329.03,279.61 341.54,292.11 U17.5@341.54,371.06 341.54,420 320,441.54 320,578.46 341.54,600 v1@341.54,638.49 ; v1@343.04,638.49 v1(343.04,640) ; v1(470,1250) 470,1207.42 U10.5@471.43,1206 ; U9.5@555,1651.42 v1(555,1695) ; U4.5@1135,1344.42 v1(1135,1390) ; v1(1515,940) 1515,895.42 U3.5@1516.43,894
I2C_SDA2: R53.2 U16.5 U18.5 U19.5 U24.5 U25.5 | length 4038.5
  Top Layer w10: v1(-822,51.42) -823.42,50 -1118,50 -1135,67 -1135,220 -1210.23,295.23 -1210.23,836.73 -1192,854.96 -1192,931 v1(-1188,935) -1063.07,935 -1053.07,945 -966.72,945 -940,971.72 -940,1365 -915,1390 v1(-765,1390) -610.91,1390 -595.91,1375 -595.91,1270.91 -570,1245 -456.01,1245 -447.01,1236 -378,1236 -357,1215 v1(-315,1215) -315,1535 v1(-495,1715)
  Bottom Layer w10: U25.5@-1188,894.42 v1(-1188,935) ; v1(-822,51.42) -681.42,51.42 -629.12,-0.88 -488.58,-0.88 -458.58,-30.88 R53.2@-458.58,-40 -390,-40 -380,-50 -345.2,-50 -338.39,-43.18 -338.39,28.08 U16.5@-337.6,28.87 ; U24.5@-765,1345.42 v1(-765,1390) ; U19.5@-495,1671.57 v1(-495,1715) ; v1(-315,1215) -314,1216 U18.5@-240.57,1216
NBOOT0_CNE: R19.2 S1.10 U13.43 U13.44 | length 1967.3
  Top Layer w8: S1.10@-120,540 -122,540 -142,520 -142,105 -84,47 -84,-83.25 -60.84,-106.41 -60.84,-450.9 v1(-60,-451.74)
  Bottom Layer w8: v1(-60,-451.74) -11.9,-499.84 U13.43@135.43,-499.84 190,-499.84 ; U13.44@135.43,-519.53 135.9,-520 180,-520 190,-510 190,-499.84 ; R19.2@560,-166.42 560,-210 540,-230 539.71,-229.71 389.2,-229.71 295.85,-323.06 295.85,-422.77 218.79,-499.84 190,-499.84
NCBP_CONTROL: S2.3 U13.2 | length 2027.9
  Top Layer w8: S2.3@40,1244.74 69.74,1244.74 70,1245 79,1236 80,1236 80,1202.97 82,1200.97 82,691.96 30,639.96 30,100 0,70 0,-48.46 104,-152.46 104,-486 v1(60,-530)
  Bottom Layer w8: v1(60,-530) 63.58,-533.58 U13.2@63.58,-650.43
NetC1_1: C1.1 U13.3 Y1.1 | length 548.6
  Bottom Layer w8: U13.3@43.9,-650.43 43.9,-693.1 56.79,-706 166.43,-706 272.43,-600 Y1.1@340,-600 340,-553.72 339.32,-553.04 352.35,-540 C1.1@447.2,-540
NetC3_1: C3.1 U13.4 Y1.2 | length 535.5
  Bottom Layer w8: U13.4@24.21,-650.43 24.21,-710.12 36.1,-722 176.43,-722 200,-698.43 Y1.2@340,-698.43 352.01,-698.43 400,-650.43 400,-640.77 411.36,-629.41 437.79,-629.41 C3.1@447.2,-620
NetC4_2: C4.2 R27.1 Y2.1 | length 330.7
  Bottom Layer w10: R27.1@339.43,-780 431.19,-780 Y2.1@489.64,-721.56 571.56,-721.56 580,-730 638.39,-730 C4.2@641.23,-727.17
NetC5_2: C5.2 R29.2 Y2.2 | length 379.1
  Bottom Layer w10: R29.2@339.43,-865 391.36,-916.93 391.36,-960 411.36,-980 488.08,-980 Y2.2@489.64,-978.45 571.59,-978.45 583.62,-966.42 C5.2@640,-966.42
NetC41_1: C41.1 R51.2 U16.7 U16.8 | length 439.5
  Bottom Layer w10: R51.2@-458.58,46.87 -418.38,46.87 -364.06,101.19 -294.16,101.19 -286.42,93.45 U16.7@-286.42,50.2 -286.42,9.78 -280,3.36 -260.83,3.36 ; U16.8@-260.83,50.2 -260.83,3.36 ; C41.1@-185,-13.58 -243.88,-13.58 -260.83,3.36
NetC42_1: C42.1 R54.2 U17.7 U17.8 | length 340.6
  Bottom Layer w8: U17.7@392.72,371.06 392.72,412.72 397.2,417.2 416.1,417.2 ; U17.7@392.92,344.86 392.92,368.96 U17.7@393.87,369.91 ; U17.8@418.92,344.86 418.92,414.39 416.1,417.2 ; C42.1@550,463.58 470,463.58 470,426.6 460.61,417.2 416.1,417.2
NetD9_1: D9.1 P1.1 | length 188
  Bottom Layer w25: D9.1@1715,-61.02 P1.1@1715,85 1715,43
NetD18_2: D18.2 Q1.D R8.2 U3.2 U5.1 | length 966
  Bottom Layer w15: R8.2@1077,796.42 1128.08,796.42 1147.71,776.79 1222.79,776.79 1240,794 U3.2@1319.57,794 1389,794 1418,765 Q1.D@1418,664 Q1.D@1420,662 ; D18.2@1326.42,468 1326.42,516.42 1354,544 1402.75,544 1418,559.25 ; Q1.D@1418,662 1418,559.25 ; U5.1@1537.41,666.4 1510.4,666.4 1498,654 1498,559 1483,544 1431,544 1418,557 1418,559.25